# EAGLE board core (EAGLE 9.6.2), part 1 of 2
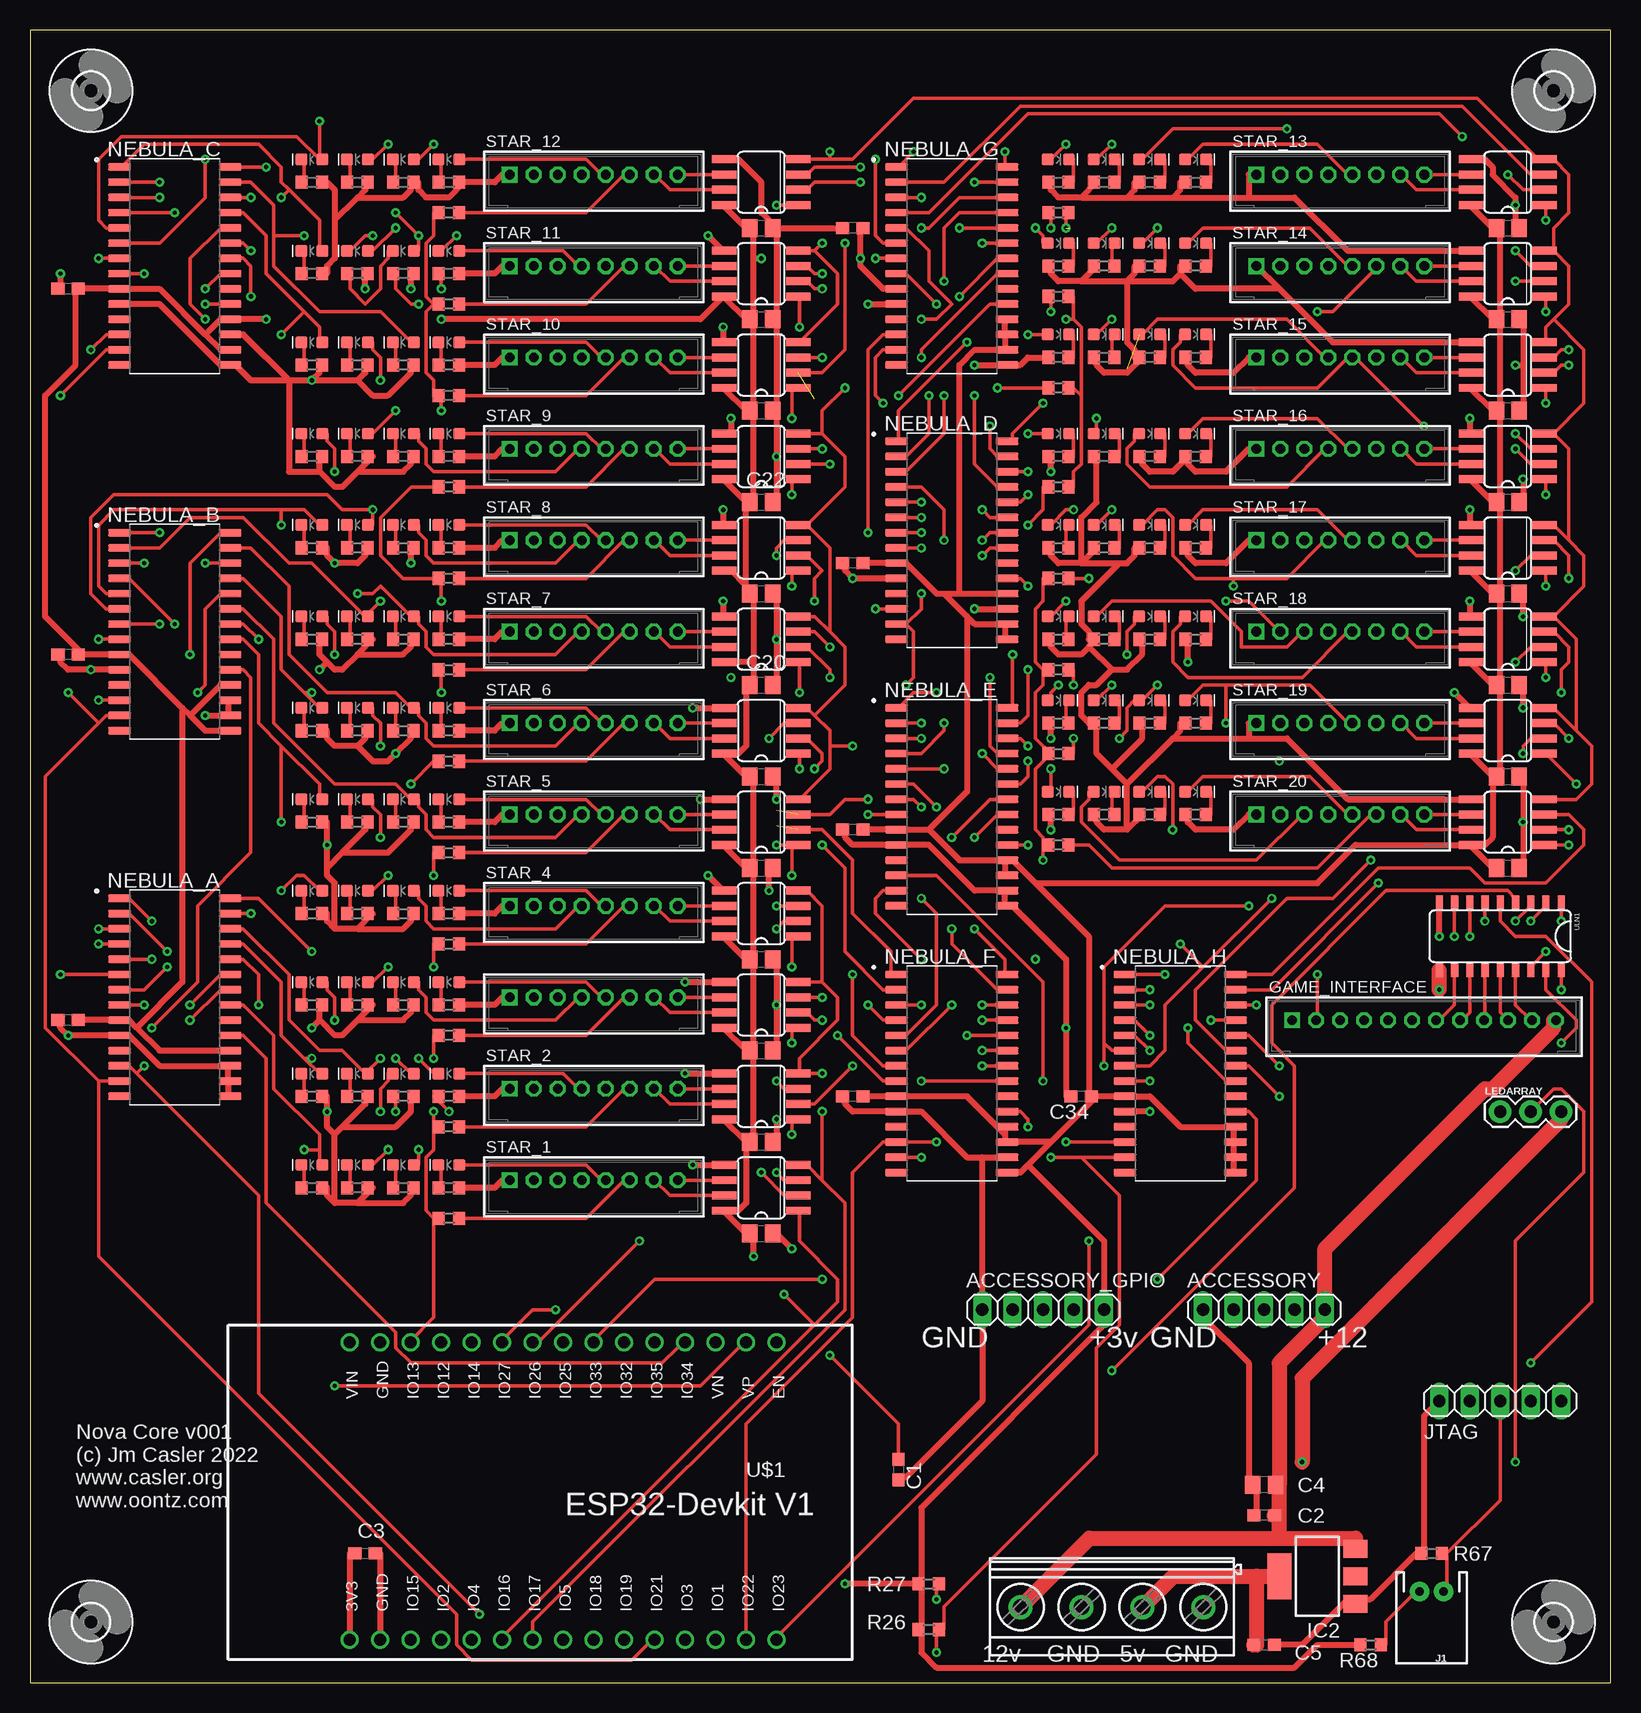
[diagram p0: board, top side]
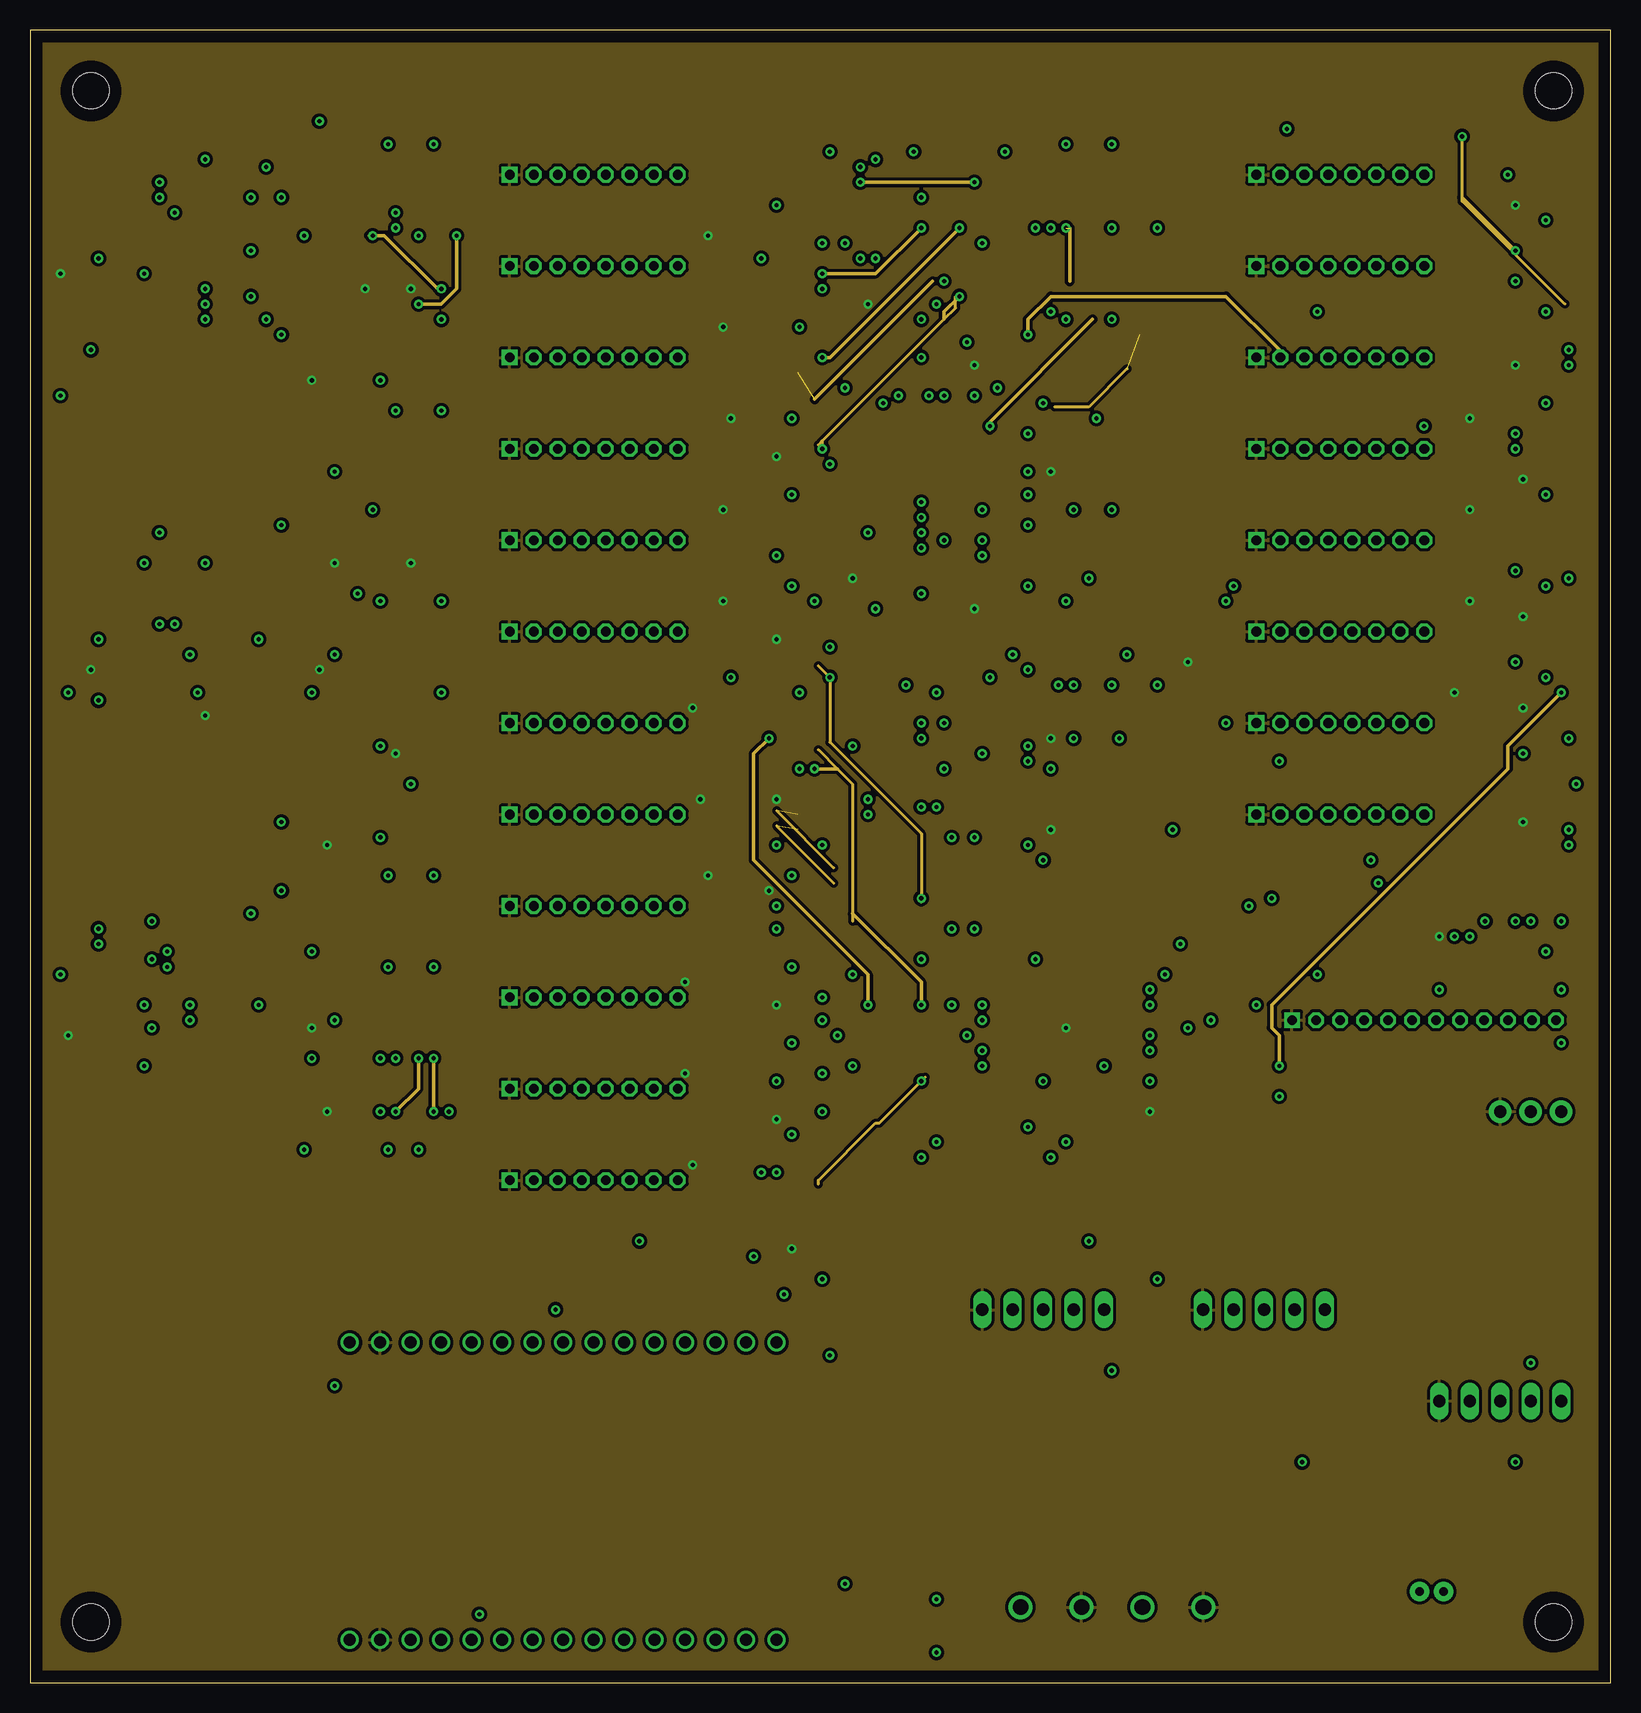
[diagram p1: board, inner layer $GND]
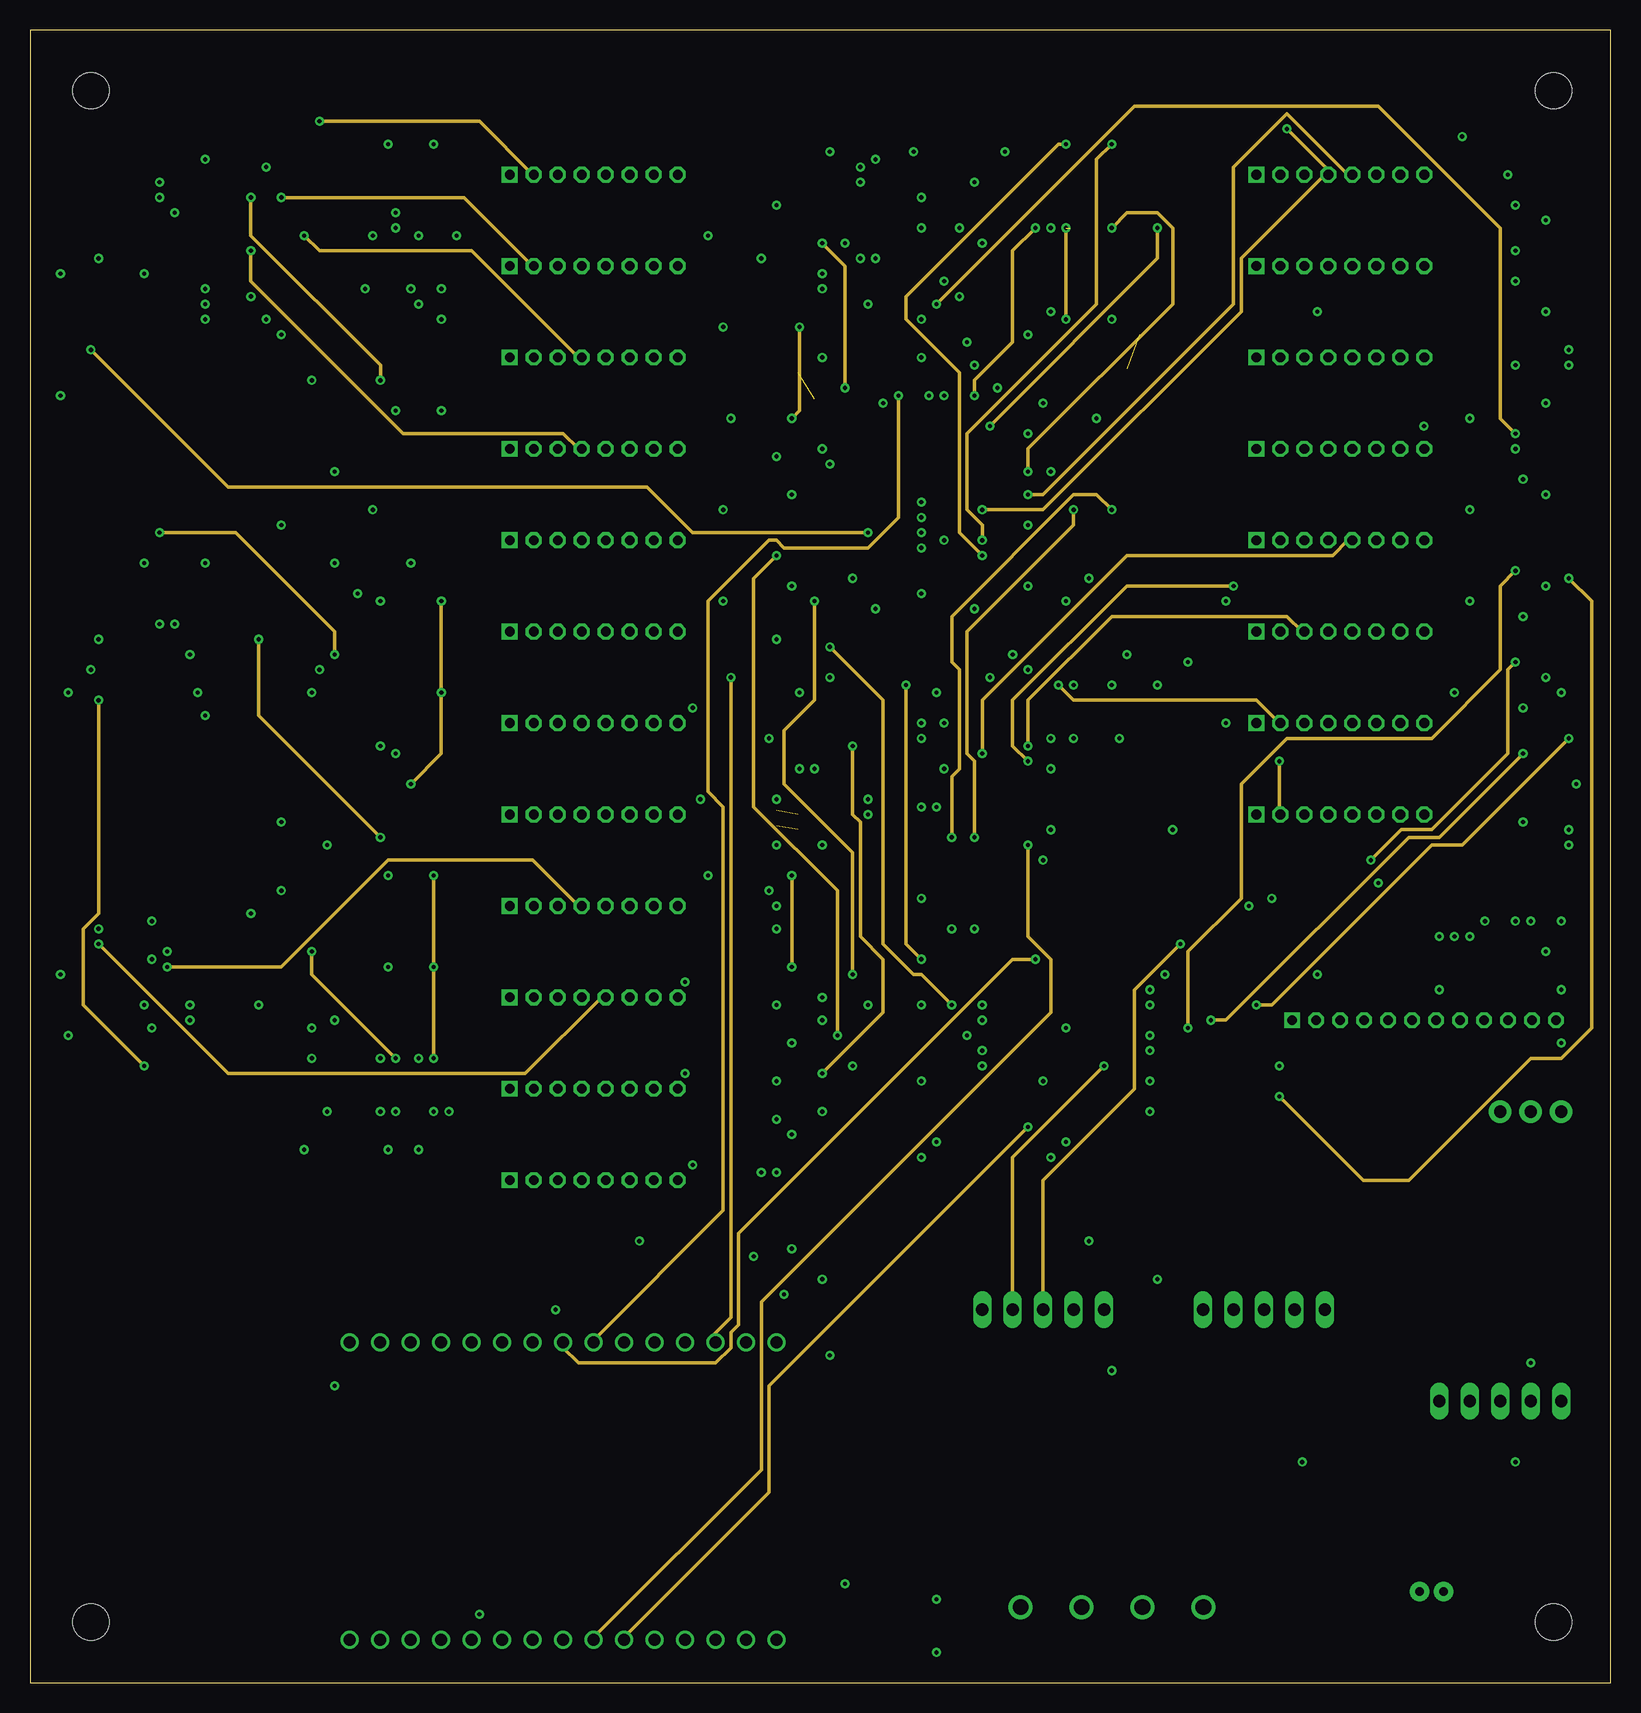
[diagram p2: board, inner layer SIGNAL3]
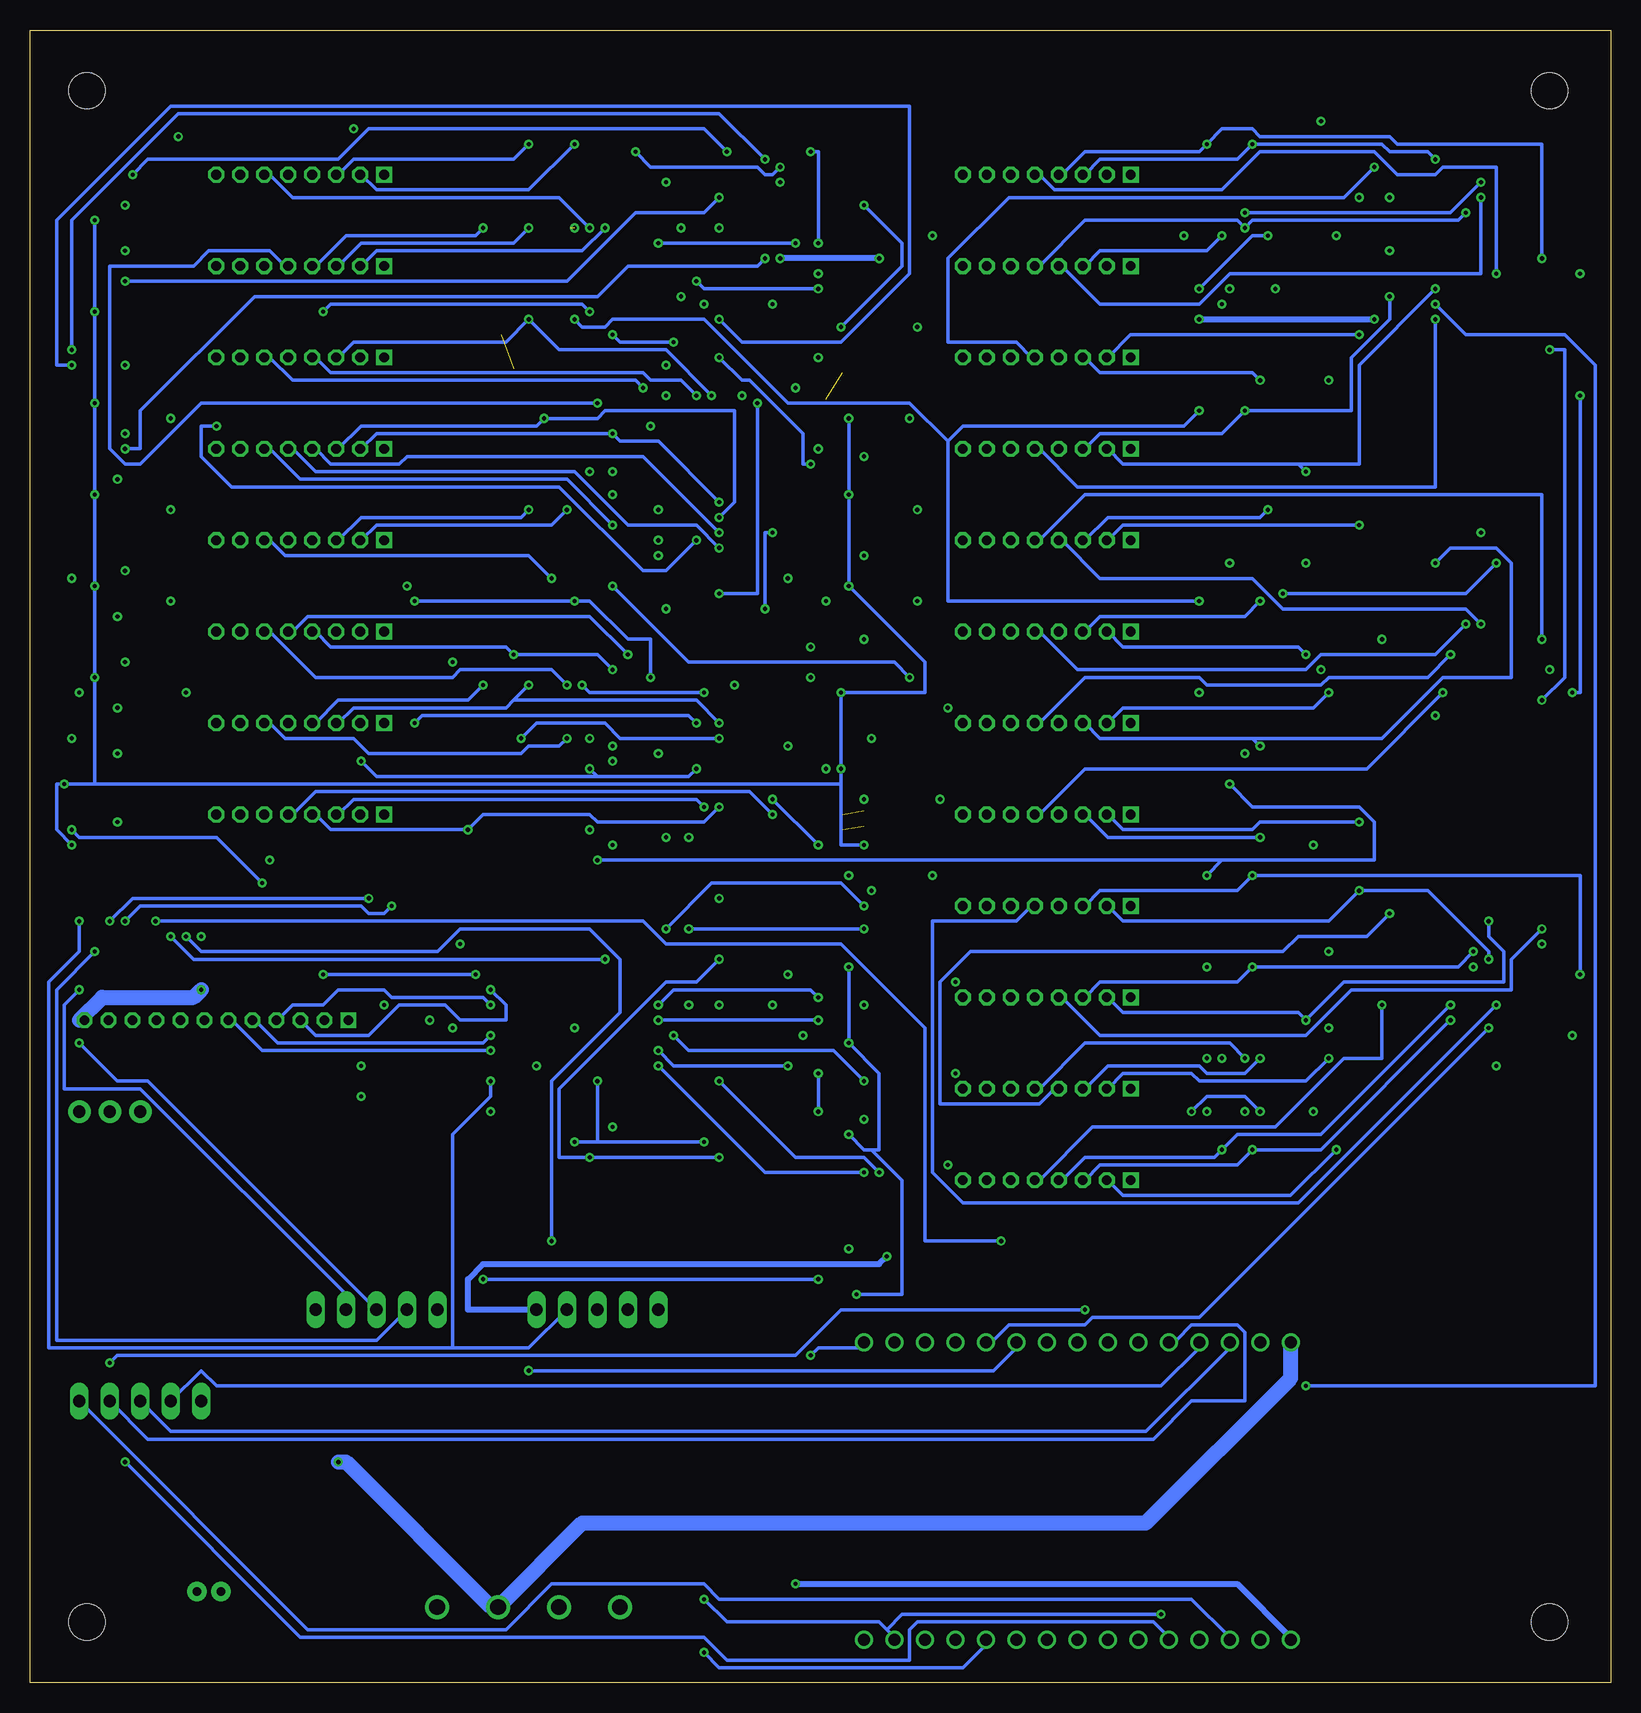
[diagram p3: board, bottom side, seen from below]

Size 131.75 x 137.78 mm. Coordinates in mm from the lower left corner, seen from the top.
Outline: 0,0 131.75,0 131.75,137.78 0,137.78 0,0
Copper layers (1+2*15+16): Top 0.035mm / dielectric 1.5mm / $GND 0.035mm / dielectric 0.15mm / SIGNAL3 0.035mm / dielectric 0.2mm / Bottom 0.035mm
Design rules "default *": minimum track width 6mil, minimum drill 0.35mm, track to track 6mil, track to pad 6mil, pad to pad 6mil, via to via 6mil, smd to smd 6mil, copper to edge 40mil, drill to drill 6mil, minimum pad ring 10mil, minimum via ring 8mil, stop-mask expansion 4mil, vias tented up to drill 20mil, thermal gap 10mil
Net classes: 0 default: width 0.305 mm, clearance 0.254 mm; 1 GND: width 0.508 mm, clearance 0.254 mm; 2 12V: width 1.27 mm, clearance 0.254 mm; 3 5V: width 1.27 mm, clearance 0.254 mm; 4 3V3: width 0.508 mm, clearance 0.254 mm; 5 12V_FUSED: width 0.635 mm, clearance 0.254 mm

## Footprints (pad centres in the part's own frame; a part is rotated, then mirrored left to right if it is on the bottom)
1X05 = drill 1.016 long: 1 -5.08,0; 2 -2.54,0; 3 0,0; 4 2.54,0; 5 5.08,0
C0603 = smd 1.1 x 1: 1 -0.85,0; 2 0.85,0
C0805 = smd 1.3 x 1.5: 1 -0.95,0; 2 0.95,0
LED-0603 = smd 1 x 1: A -0.877,0; C 0.877,0
B12B-PH-K = drill 0.813 square: 1 -11,0 | drill 0.813 octagon: 2 -9,0; 3 -7,0; 4 -5,0; 5 -3,0; 6 -1,0; 7 1,0; 8 3,0; 9 5,0; 10 7,0; 11 9,0; 12 11,0
3,0 = hole 3: 0,0
SO08 = smd 0.66 x 2.032: 1 -1.905,-3.073; 2 -0.635,-3.073; 3 0.635,-3.073; 4 1.905,-3.073; 5 1.905,3.073; 6 0.635,3.073; 7 -0.635,3.073; 8 -1.905,3.073
SOT223 = smd 1.5 x 2: 1 -2.3,-3.15; 2 0,-3.15; 3 2.3,-3.15 | smd 3.8 x 2: 4 0,3.15
JST-2-PTH = drill 0.7 pad 1.6: 1 -1,0; 2 1,0
1X03 = drill 1.016 pad 1.88: 1 0,0; 2 2.54,0; 3 5.08,0
SOIC127P1030X265-28N = smd 1.9 x 0.6: 1 -4.605,8.255; 2 -4.605,6.985; 3 -4.605,5.715; 4 -4.605,4.445; 5 -4.605,3.175; 6 -4.605,1.905; 7 -4.605,0.635; 8 -4.605,-0.635; 9 -4.605,-1.905; 10 -4.605,-3.175; 11 -4.605,-4.445; 12 -4.605,-5.715; 13 -4.605,-6.985; 14 -4.605,-8.255; 15 4.605,-8.255; 16 4.605,-6.985; 17 4.605,-5.715; 18 4.605,-4.445; 19 4.605,-3.175; 20 4.605,-1.905; 21 4.605,-0.635; 22 4.605,0.635; 23 4.605,1.905; 24 4.605,3.175; 25 4.605,4.445; 26 4.605,5.715; 27 4.605,6.985; 28 4.605,8.255
MKDSN1,5/4-5,08 = drill 1.3 pad 2: 1 -7.641,0.025; 2 -2.561,0.025; 3 2.519,0.025; 4 7.599,0.025
R0603 = smd 1 x 1.1: 1 -0.85,0; 2 0.85,0
B8B-PH-K = drill 0.813 square: 1 -7,0 | drill 0.813 octagon: 2 -5,0; 3 -3,0; 4 -1,0; 5 1,0; 6 3,0; 7 5,0; 8 7,0
ESP32-DEVKITV1 = drill 1 pad 1.422: 1 -22.87,-13.54; 2 -20.33,-13.54; 3 -17.79,-13.54; 4 -15.25,-13.54; 5 -12.71,-13.54; 6 -10.17,-13.54; 7 -7.63,-13.54; 8 -5.09,-13.54; 9 -2.55,-13.54; 10 -0.01,-13.54; 11 2.53,-13.54; 12 5.07,-13.54; 13 7.61,-13.54; 14 10.15,-13.54; 15 12.69,-13.54; 16 12.69,11.23; 17 10.15,11.23; 18 7.61,11.23; 19 5.07,11.23; 20 2.53,11.23; 21 -0.01,11.23; 22 -2.55,11.23; 23 -5.09,11.23; 24 -7.63,11.23; 25 -10.17,11.23; 26 -12.71,11.23; 27 -15.25,11.23; 28 -17.79,11.23; 29 -20.33,11.23; 30 -22.87,11.23
SO018 = smd 0.6 x 1.2: 1 -5.08,-2.8; 2 -3.81,-2.8; 3 -2.54,-2.8; 4 -1.27,-2.8; 5 0,-2.8; 6 1.27,-2.8; 7 2.54,-2.8; 8 3.81,-2.8; 9 5.08,-2.8; 10 5.08,2.8; 11 3.81,2.8; 12 2.54,2.8; 13 1.27,2.8; 14 0,2.8; 15 -1.27,2.8; 16 -2.54,2.8; 17 -3.81,2.8; 18 -5.08,2.8

## Placement (x,y rotation side)
ACCESSORY  [1X05]  102.87,31.11 0 top
ACCESSORY_GPIO  [1X05]  84.45,31.11 0 top
C1  10uf  [C0603]  72.39,17.78 270 top
C2  10uf  [C0603]  102.87,13.97 180 top
C3  10uf  [C0603]  27.94,10.79 0 top
C4  1uf  [C0805]  102.87,16.51 180 top
C5  10uf  [C0603]  102.87,3.17 0 top
C7  10uf  [C0603]  68.58,71.12 180 top
C8  10uf  [C0603]  3.17,55.24 180 top
C9  10uf  [C0603]  3.17,116.2 180 top
C10  10uf  [C0603]  3.17,85.72 180 top
C11  10uf  [C0603]  68.58,93.34 180 top
C12  10uf  [C0603]  68.58,48.9 180 top
C13  10uf  [C0603]  68.58,121.28 180 top
C14  1uf  [C0805]  60.96,37.47 0 top
C15  1uf  [C0805]  60.96,45.09 0 top
C16  1uf  [C0805]  60.96,52.7 0 top
C17  1uf  [C0805]  60.96,60.33 0 top
C18  1uf  [C0805]  60.96,67.94 0 top
C19  1uf  [C0805]  60.96,75.56 0 top
C20  1uf  [C0805]  60.96,83.19 0 top
C21  1uf  [C0805]  60.96,90.81 0 top
C22  1uf  [C0805]  60.96,98.42 0 top
C23  1uf  [C0805]  60.96,106.05 0 top
C24  1uf  [C0805]  60.96,113.67 0 top
C25  1uf  [C0805]  60.96,121.28 0 top
C26  1uf  [C0805]  123.19,67.94 0 top
C27  1uf  [C0805]  123.19,75.56 0 top
C28  1uf  [C0805]  123.19,83.19 0 top
C29  1uf  [C0805]  123.19,90.81 0 top
C30  1uf  [C0805]  123.19,98.42 0 top
C31  1uf  [C0805]  123.19,106.05 0 top
C32  1uf  [C0805]  123.19,113.67 0 top
C33  1uf  [C0805]  123.19,121.28 0 top
C34  10uf  [C0603]  87.63,48.9 180 top
D1  [LED-0603]  85.72,127 0 top
D2  [LED-0603]  23.5,43.18 180 top
D3  [LED-0603]  27.3,43.18 180 top
D4  [LED-0603]  31.11,43.18 180 top
D5  [LED-0603]  34.92,43.18 180 top
D6  [LED-0603]  23.5,50.8 180 top
D7  [LED-0603]  27.3,50.8 180 top
D8  [LED-0603]  34.92,50.8 180 top
D9  [LED-0603]  31.11,50.8 180 top
D10  [LED-0603]  23.5,58.42 180 top
D11  [LED-0603]  27.3,58.42 180 top
D12  [LED-0603]  31.11,58.42 180 top
D13  [LED-0603]  34.92,58.42 180 top
D14  [LED-0603]  23.5,66.04 180 top
D15  [LED-0603]  27.3,66.04 180 top
D16  [LED-0603]  31.11,66.04 180 top
D17  [LED-0603]  34.92,66.04 180 top
D18  [LED-0603]  23.5,73.66 180 top
D19  [LED-0603]  27.3,73.66 180 top
D20  [LED-0603]  31.11,73.66 180 top
D21  [LED-0603]  34.92,73.66 180 top
D22  [LED-0603]  23.5,81.28 180 top
D23  [LED-0603]  27.3,81.28 180 top
D24  [LED-0603]  31.11,81.28 180 top
D25  [LED-0603]  34.92,81.28 180 top
D26  [LED-0603]  23.5,88.9 180 top
D27  [LED-0603]  27.3,88.9 180 top
D28  [LED-0603]  31.11,88.9 180 top
D29  [LED-0603]  34.92,88.9 180 top
D30  [LED-0603]  23.5,96.52 180 top
D31  [LED-0603]  27.3,96.52 180 top
D32  [LED-0603]  31.11,96.52 180 top
D33  [LED-0603]  34.92,96.52 180 top
D34  [LED-0603]  23.5,104.14 180 top
D35  [LED-0603]  27.3,104.14 180 top
D36  [LED-0603]  31.11,104.14 180 top
D37  [LED-0603]  34.92,104.14 180 top
D38  [LED-0603]  23.5,111.76 180 top
D39  [LED-0603]  27.3,111.76 180 top
D40  [LED-0603]  31.11,111.76 180 top
D41  [LED-0603]  34.92,111.76 180 top
D42  [LED-0603]  23.5,119.38 180 top
D43  [LED-0603]  31.11,119.38 180 top
D44  [LED-0603]  34.92,119.38 180 top
D45  [LED-0603]  27.3,119.38 180 top
D46  [LED-0603]  23.5,127 180 top
D47  [LED-0603]  27.3,127 180 top
D48  [LED-0603]  31.11,127 180 top
D49  [LED-0603]  34.92,127 180 top
D50  [LED-0603]  89.53,127 0 top
D51  [LED-0603]  93.34,127 0 top
D52  [LED-0603]  97.16,127 0 top
D53  [LED-0603]  85.72,120.02 0 top
D54  [LED-0603]  89.53,120.02 0 top
D55  [LED-0603]  93.34,120.02 0 top
D56  [LED-0603]  97.16,120.02 0 top
D57  [LED-0603]  85.72,112.39 0 top
D58  [LED-0603]  89.53,112.39 0 top
D59  [LED-0603]  93.34,112.39 0 top
D60  [LED-0603]  97.16,112.39 0 top
D61  [LED-0603]  85.72,104.14 0 top
D62  [LED-0603]  89.53,104.14 0 top
D63  [LED-0603]  93.34,104.14 0 top
D64  [LED-0603]  97.16,104.14 0 top
D65  [LED-0603]  85.72,96.52 0 top
D66  [LED-0603]  89.53,96.52 0 top
D67  [LED-0603]  93.34,96.52 0 top
D68  [LED-0603]  97.16,96.52 0 top
D69  [LED-0603]  85.72,88.9 0 top
D70  [LED-0603]  89.53,88.9 0 top
D71  [LED-0603]  93.34,88.9 0 top
D72  [LED-0603]  97.16,88.9 0 top
D73  [LED-0603]  85.72,81.92 0 top
D74  [LED-0603]  89.53,81.92 0 top
D75  [LED-0603]  93.34,81.92 0 top
D76  [LED-0603]  97.16,81.92 0 top
D77  [LED-0603]  85.72,74.3 0 top
D78  [LED-0603]  89.53,74.3 0 top
D79  [LED-0603]  93.34,74.3 0 top
D80  [LED-0603]  97.16,74.3 0 top
GAME_INTERFACE  B12B-PH-K  [B12B-PH-K]  116.2,55.24 0 top
H1  MOUNT-HOLE3.0  [3,0]  127,5.08 0 top
H2  MOUNT-HOLE3.0  [3,0]  127,132.72 0 top
H3  MOUNT-HOLE3.0  [3,0]  5.08,132.72 0 top
H4  MOUNT-HOLE3.0  [3,0]  5.08,5.08 0 top
IC1  MAX481CSA  [SO08]  60.96,41.27 90 top
IC2  LD117AS12TR  [SOT223]  107.31,8.89 90 top
IC3  MAX481CSA  [SO08]  60.96,48.9 90 top
IC4  MAX481CSA  [SO08]  60.96,56.52 90 top
IC5  MAX481CSA  [SO08]  60.96,64.14 90 top
IC6  MAX481CSA  [SO08]  60.96,71.75 90 top
IC7  MAX481CSA  [SO08]  60.96,79.38 90 top
IC8  MAX481CSA  [SO08]  60.96,87 90 top
IC9  MAX481CSA  [SO08]  60.96,94.61 90 top
IC10  MAX481CSA  [SO08]  60.96,102.23 90 top
IC11  MAX481CSA  [SO08]  60.96,109.86 90 top
IC12  MAX481CSA  [SO08]  60.96,117.47 90 top
IC13  MAX481CSA  [SO08]  60.96,125.09 90 top
IC14  MAX481CSA  [SO08]  123.19,125.09 90 top
IC15  MAX481CSA  [SO08]  123.19,117.47 90 top
IC16  MAX481CSA  [SO08]  123.19,109.86 90 top
IC17  MAX481CSA  [SO08]  123.19,102.23 90 top
IC18  MAX481CSA  [SO08]  123.19,94.61 90 top
IC19  MAX481CSA  [SO08]  123.19,87 90 top
IC20  MAX481CSA  [SO08]  123.19,79.38 90 top
IC21  MAX481CSA  [SO08]  123.19,71.75 90 top
J1  [JST-2-PTH]  116.84,7.62 180 top
JTAG  [1X05]  122.56,23.5 0 top
LEDARRAY  [1X03]  122.56,47.62 0 top
NEBULA_A  MCP23017-E/SO  [SOIC127P1030X265-28N]  12.06,57.15 0 top
NEBULA_B  MCP23017-E/SO  [SOIC127P1030X265-28N]  12.06,87.63 0 top
NEBULA_C  MCP23017-E/SO  [SOIC127P1030X265-28N]  12.06,118.11 0 top
NEBULA_D  MCP23017-E/SO  [SOIC127P1030X265-28N]  76.83,95.25 0 top
NEBULA_E  MCP23017-E/SO  [SOIC127P1030X265-28N]  76.83,73.03 0 top
NEBULA_F  MCP23017-E/SO  [SOIC127P1030X265-28N]  76.83,50.8 0 top
NEBULA_G  MCP23017-E/SO  [SOIC127P1030X265-28N]  76.83,118.11 0 top
NEBULA_H  MCP23017-E/SO  [SOIC127P1030X265-28N]  95.89,50.8 0 top
POWER_IN  MKDSN1,5/4-5,08  [MKDSN1,5/4-5,08]  90.17,6.35 180 top
R3  10k  [R0603]  23.5,41.27 180 top
R4  10k  [R0603]  27.3,41.27 180 top
R5  10k  [R0603]  31.11,41.27 180 top
R6  10k  [R0603]  34.92,41.27 180 top
R7  10k  [R0603]  23.5,48.9 180 top
R8  10k  [R0603]  27.3,48.9 180 top
R9  10k  [R0603]  31.11,48.9 180 top
R10  10k  [R0603]  34.92,48.9 180 top
R11  10k  [R0603]  23.5,56.52 180 top
R12  10k  [R0603]  27.3,56.52 180 top
R13  10k  [R0603]  31.11,56.52 180 top
R14  10k  [R0603]  34.92,56.52 180 top
R15  10k  [R0603]  23.5,64.14 180 top
R16  10k  [R0603]  27.3,64.14 180 top
R17  10k  [R0603]  31.11,64.14 180 top
R18  10k  [R0603]  34.92,64.14 180 top
R19  10k  [R0603]  23.5,71.75 180 top
R20  10k  [R0603]  27.3,71.75 180 top
R21  10k  [R0603]  31.11,71.75 180 top
R22  10k  [R0603]  34.92,71.75 180 top
R23  10k  [R0603]  23.5,79.38 180 top
R24  10k  [R0603]  27.3,79.38 180 top
R25  10k  [R0603]  31.11,79.38 180 top
R26  10k  [R0603]  74.93,4.45 180 top
R27  10k  [R0603]  74.93,8.26 180 top
R28  10k  [R0603]  34.92,79.38 180 top
R29  10k  [R0603]  23.5,87 180 top
R30  10k  [R0603]  27.3,87 180 top
R31  10k  [R0603]  31.11,87 180 top
R32  10k  [R0603]  34.92,87 180 top
R33  10k  [R0603]  23.5,94.61 180 top
R34  10k  [R0603]  27.3,94.61 180 top
R35  10k  [R0603]  31.11,94.61 180 top
R36  10k  [R0603]  34.92,94.61 180 top
R37  10k  [R0603]  23.5,102.23 180 top
R38  10k  [R0603]  27.3,102.23 180 top
R39  10k  [R0603]  31.11,102.23 180 top
R40  10k  [R0603]  34.92,102.23 180 top
R41  10k  [R0603]  23.5,109.86 180 top
R42  10k  [R0603]  27.3,109.86 180 top
R43  10k  [R0603]  31.11,109.86 180 top
R44  10k  [R0603]  34.92,109.86 180 top
R45  10k  [R0603]  23.5,117.47 180 top
R46  10k  [R0603]  27.3,117.47 180 top
R47  10k  [R0603]  31.11,117.47 180 top
R48  10k  [R0603]  34.92,117.47 180 top
R49  10k  [R0603]  23.5,125.09 180 top
R50  10k  [R0603]  27.3,125.09 180 top
R51  10k  [R0603]  31.11,125.09 180 top
R52  10k  [R0603]  34.92,125.09 180 top
R53  10k  [R0603]  85.72,125.09 0 top
R54  68  [R0603]  34.92,38.73 0 top
R55  68  [R0603]  34.92,46.35 0 top
R56  68  [R0603]  34.92,53.98 0 top
R57  68  [R0603]  34.92,61.59 0 top
R58  68  [R0603]  34.92,69.22 0 top
R59  68  [R0603]  34.92,76.83 0 top
R60  68  [R0603]  34.92,84.45 0 top
R61  68  [R0603]  34.92,92.08 0 top
R62  68  [R0603]  34.92,99.69 0 top
R63  68  [R0603]  34.92,107.31 0 top
R64  68  [R0603]  34.92,114.94 0 top
R65  68  [R0603]  34.92,122.56 0 top
R66  10k  [R0603]  89.53,125.09 0 top
R67  10k  [R0603]  116.84,10.79 180 top
R68  68  [R0603]  111.76,3.17 180 top
R69  10k  [R0603]  93.34,125.09 0 top
R70  10k  [R0603]  97.16,125.09 0 top
R71  10k  [R0603]  85.72,118.11 0 top
R72  10k  [R0603]  89.53,118.11 0 top
R73  10k  [R0603]  93.34,118.11 0 top
R74  10k  [R0603]  97.16,118.11 0 top
R75  10k  [R0603]  85.72,110.49 0 top
R76  10k  [R0603]  89.53,110.49 0 top
R77  10k  [R0603]  93.34,110.49 0 top
R78  10k  [R0603]  97.16,110.49 0 top
R79  10k  [R0603]  85.72,102.23 0 top
R80  10k  [R0603]  89.53,102.23 0 top
R81  10k  [R0603]  93.34,102.23 0 top
R82  10k  [R0603]  97.16,102.23 0 top
R83  68  [R0603]  85.72,122.56 180 top
R84  68  [R0603]  85.72,115.57 180 top
R85  68  [R0603]  85.72,107.95 180 top
R86  68  [R0603]  85.72,99.69 180 top
R87  10k  [R0603]  85.72,94.61 0 top
R88  10k  [R0603]  89.53,94.61 0 top
R89  10k  [R0603]  93.34,94.61 0 top
R90  10k  [R0603]  97.16,94.61 0 top
R91  10k  [R0603]  85.72,87 0 top
R92  10k  [R0603]  89.53,87 0 top
R93  10k  [R0603]  93.34,87 0 top
R94  10k  [R0603]  97.16,87 0 top
R95  10k  [R0603]  85.72,80.01 0 top
R96  10k  [R0603]  89.53,80.01 0 top
R97  10k  [R0603]  93.34,80.01 0 top
R98  10k  [R0603]  97.16,80.01 0 top
R99  10k  [R0603]  85.72,72.39 0 top
R100  10k  [R0603]  89.53,72.39 0 top
R101  10k  [R0603]  93.34,72.39 0 top
R102  10k  [R0603]  97.16,72.39 0 top
R103  68  [R0603]  85.72,92.08 0 top
R104  68  [R0603]  85.72,84.45 0 top
R105  68  [R0603]  85.72,77.47 0 top
R106  68  [R0603]  85.72,69.85 0 top
STAR_1  B8B-PH-K  [B8B-PH-K]  46.99,41.91 0 top
STAR_2  B8B-PH-K  [B8B-PH-K]  46.99,49.53 0 top
STAR_3  B8B-PH-K  [B8B-PH-K]  46.99,57.15 0 top
STAR_4  B8B-PH-K  [B8B-PH-K]  46.99,64.77 0 top
STAR_5  B8B-PH-K  [B8B-PH-K]  46.99,72.39 0 top
STAR_6  B8B-PH-K  [B8B-PH-K]  46.99,80.01 0 top
STAR_7  B8B-PH-K  [B8B-PH-K]  46.99,87.63 0 top
STAR_8  B8B-PH-K  [B8B-PH-K]  46.99,95.25 0 top
STAR_9  B8B-PH-K  [B8B-PH-K]  46.99,102.87 0 top
STAR_10  B8B-PH-K  [B8B-PH-K]  46.99,110.49 0 top
STAR_11  B8B-PH-K  [B8B-PH-K]  46.99,118.11 0 top
STAR_12  B8B-PH-K  [B8B-PH-K]  46.99,125.73 0 top
STAR_13  B8B-PH-K  [B8B-PH-K]  109.22,125.73 0 top
STAR_14  B8B-PH-K  [B8B-PH-K]  109.22,118.11 0 top
STAR_15  B8B-PH-K  [B8B-PH-K]  109.22,110.49 0 top
STAR_16  B8B-PH-K  [B8B-PH-K]  109.22,102.87 0 top
STAR_17  B8B-PH-K  [B8B-PH-K]  109.22,95.25 0 top
STAR_18  B8B-PH-K  [B8B-PH-K]  109.22,87.63 0 top
STAR_19  B8B-PH-K  [B8B-PH-K]  109.22,80.01 0 top
STAR_20  B8B-PH-K  [B8B-PH-K]  109.22,72.39 0 top
U$1  ESP32DEVKITV1  [ESP32-DEVKITV1]  49.53,17.14 0 top
ULN1  [SO018]  122.56,62.23 180 top

## Library data of the parts
ACCESSORY ACCESSORY_GPIO JTAG = pinhead
C1-C3 C5 C7-C13 C34 = rcl; LCSC_PART: C19702; SPICEPREFIX: C
C4 C14-C33 = rcl; LCSC_PART: C15849; SPICEPREFIX: C
D1 D2 D6 D10 D14 D18 D22 D26 D30 D34 D38 D42 D46 D53 D57 D61 D65 D69 D73 D77 = SparkFun-LED; LCSC_PART: C2286
D3 D7 D11 D15 D19 D23 D27 D31 D35 D39 D43 D47 D50 D54 D58 D62 D66 D70 D74 D78 = SparkFun-LED; LCSC_PART: C72043
D4 D8 D12 D16 D20 D24 D28 D32 D36 D40 D44 D48 D51 D55 D59 D63 D67 D71 D75 D79 = SparkFun-LED; LCSC_PART: C72041
D5 D9 D13 D17 D21 D25 D29 D33 D37 D41 D45 D49 D52 D56 D60 D64 D68 D72 D76 D80 = SparkFun-LED; LCSC_PART: C2290
GAME_INTERFACE STAR_1-STAR_20 = con-jst-ph
H1-H4 = holes
IC1 IC3-IC21 = maxim; LCSC_PART: C8963; MF: MAXIM; MPN: MAX481CSA; OC_FARNELL: unknown; OC_NEWARK: 90C3817
IC2 = v-reg; LCSC_PART: C6187; PRICE: 0.5
J1 = SparkFun-Connectors; PROD_ID: CONN-09863; SKU: PRT-09914
LEDARRAY = SparkFun-Connectors
NEBULA_A NEBULA_B NEBULA_C NEBULA_D NEBULA_E NEBULA_F NEBULA_G NEBULA_H = MCP23017-E_SO; AVAILABILITY: In Stock; DESCRIPTION: I/O Expander 16 I²C 1.7 MHz 28-SOIC; LCSC_PART: C629440; MF: Microchip; MP: MCP23017-E/SO; PACKAGE: SOIC-28 Microchip; PRICE: None; PURCHASE-URL: https://pricing.snapeda.com/search/part/MCP23017-E/SO/?ref=eda
POWER_IN = con-phoenix-508
R3-R106 = rcl; LCSC_PART: C25804; SPICEPREFIX: R
U$1 = ESP32-DEVKITV1
ULN1 = SparkFun-IC-Special-Function

## Nets
2: U$1.4
4: LEDARRAY.2 U$1.5
5: U$1.8
12: JTAG.2 U$1.27
13: J1.1 JTAG.3 R54.1 R55.1 R56.1 R57.1 R58.1 R59.1 R60.1 R61.1 R62.1 R63.1 R64.1 R65.1 R67.1 R83.1 R84.1 R85.1 R86.1 R103.1 R104.1 R105.1 R106.1 U$1.28
14: JTAG.4 U$1.26
15: JTAG.5 U$1.3
16: IC1.1 IC3.1 IC4.1 IC5.1 IC6.1 IC7.1 IC8.1 IC9.1 IC10.1 IC11.1 IC12.1 IC13.1 IC14.1 IC15.1 IC16.1 IC17.1 IC18.1 IC19.1 IC20.1 IC21.1 U$1.6
17: IC1.4 IC3.4 IC4.4 IC5.4 IC6.4 IC7.4 IC8.4 IC9.4 IC10.4 IC11.4 IC12.4 IC13.4 IC14.4 IC15.4 IC16.4 IC17.4 IC18.4 IC19.4 IC20.4 IC21.4 U$1.7
18: NEBULA_E.19 U$1.9
19: NEBULA_F.19 U$1.10
21/SDA: NEBULA_A.13 NEBULA_B.13 NEBULA_C.13 NEBULA_D.13 NEBULA_E.13 NEBULA_F.13 NEBULA_G.13 NEBULA_H.13 R26.1 U$1.11
22/SCL: NEBULA_A.12 NEBULA_B.12 NEBULA_C.12 NEBULA_D.12 NEBULA_E.12 NEBULA_F.12 NEBULA_G.12 NEBULA_H.12 R27.1 U$1.14
23: U$1.15 ULN1.8
25: U$1.23 ULN1.7
26: U$1.24 ULN1.6
27: U$1.25 ULN1.5
32: U$1.21 ULN1.4
33: NEBULA_G.19 NEBULA_H.19 U$1.22
34: NEBULA_A.19 U$1.19
35: NEBULA_B.19 U$1.20
36: NEBULA_C.19 U$1.17
39: NEBULA_D.19 U$1.18
+3V3 [3V3]: ACCESSORY_GPIO.5 C3.1 C7.1 C8.1 C9.1 C10.1 C11.1 C12.1 C13.1 C14.1 C15.1 C16.1 C17.1 C18.1 C19.1 C20.1 C21.1 C22.1 C23.1 C24.1 C25.1 C26.1 C27.1 C28.1 C29.1 C30.1 C31.1 C32.1 C33.1 C34.1 IC1.8 IC3.8 IC4.8 IC5.8 IC6.8 IC7.8 IC8.8 IC9.8 IC10.8 IC11.8 IC12.8 IC13.8 IC14.8 IC15.8 IC16.8 IC17.8 IC18.8 IC19.8 IC20.8 IC21.8 NEBULA_A.9 NEBULA_A.18 NEBULA_B.9 NEBULA_B.15 NEBULA_B.18 NEBULA_C.9 NEBULA_C.16 NEBULA_C.18 NEBULA_D.9 NEBULA_D.15 NEBULA_D.16 NEBULA_D.18 NEBULA_E.9 NEBULA_E.17 NEBULA_E.18 NEBULA_F.9 NEBULA_F.15 NEBULA_F.17 NEBULA_F.18 NEBULA_G.9 NEBULA_G.16 NEBULA_G.17 NEBULA_G.18 NEBULA_H.9 NEBULA_H.15 NEBULA_H.16 NEBULA_H.17 NEBULA_H.18 R26.2 R27.2 R68.2 U$1.1
+5V [5V]: C5.1 IC2.4 LEDARRAY.3 POWER_IN.2 U$1.30
+12V [12V]: ACCESSORY.5 C2.1 C4.1 GAME_INTERFACE.12 IC2.3 POWER_IN.4 ULN1.10
A0: D2.A NEBULA_A.21 STAR_1.2
A1: D3.A NEBULA_A.22 STAR_1.3
A2: D4.A NEBULA_A.23 STAR_1.4
A3: D5.A NEBULA_A.24 STAR_1.5
A4: D6.A NEBULA_A.25 STAR_2.2
A5: D7.A NEBULA_A.26 STAR_2.3
A6: D8.A NEBULA_A.27 STAR_2.4
A7: D9.A NEBULA_A.28 STAR_2.5
A8: D10.A NEBULA_A.1 STAR_3.2
A9: D11.A NEBULA_A.2 STAR_3.3
A10: D12.A NEBULA_A.3 STAR_3.4
A11: D13.A NEBULA_A.4 STAR_3.5
A12: D14.A NEBULA_A.5 STAR_4.2
A13: D15.A NEBULA_A.6 STAR_4.3
A14: D16.A NEBULA_A.7 STAR_4.4
A15: D17.A NEBULA_A.8 STAR_4.5
B0: D18.A NEBULA_B.21 STAR_5.2
B1: D19.A NEBULA_B.22 STAR_5.3
B2: D20.A NEBULA_B.23 STAR_5.4
B3: D21.A NEBULA_B.24 STAR_5.5
B4: D22.A NEBULA_B.25 STAR_6.2
B5: D23.A NEBULA_B.26 STAR_6.3
B6: D24.A NEBULA_B.27 STAR_6.4
B7: D25.A NEBULA_B.28 STAR_6.5
B8: D26.A NEBULA_B.1 STAR_7.2
B9: D27.A NEBULA_B.2 STAR_7.3
B10: D28.A NEBULA_B.3 STAR_7.4
B11: D29.A NEBULA_B.4 STAR_7.5
B12: D30.A NEBULA_B.5 STAR_8.2
B13: D31.A NEBULA_B.6 STAR_8.3
B14: D32.A NEBULA_B.7 STAR_8.4
B15: D33.A NEBULA_B.8 STAR_8.5
C0: D34.A NEBULA_C.21 STAR_9.2
C1: D35.A NEBULA_C.22 STAR_9.3
C2: D36.A NEBULA_C.23 STAR_9.4
C3: D37.A NEBULA_C.24 STAR_9.5
C4: D38.A NEBULA_C.25 STAR_10.2
C5: D39.A NEBULA_C.26 STAR_10.3
C6: D40.A NEBULA_C.27 STAR_10.4
C7: D41.A NEBULA_C.28 STAR_10.5
C8: D42.A NEBULA_C.1 STAR_11.2
C9: D43.A NEBULA_C.2 STAR_11.3
C10: D44.A NEBULA_C.3 STAR_11.4
C11: D45.A NEBULA_C.4 STAR_11.5
C12: D46.A NEBULA_C.5 STAR_12.2
C13: D47.A NEBULA_C.6 STAR_12.3
C14: D48.A NEBULA_C.7 STAR_12.4
C15: D49.A NEBULA_C.8 STAR_12.5
D0: D1.A NEBULA_D.21 STAR_13.2
D1: D50.A NEBULA_D.22 STAR_13.3
D2: D51.A NEBULA_D.23 STAR_13.4
D3: D52.A NEBULA_D.24 STAR_13.5
D4: D53.A NEBULA_D.25 STAR_14.2
D5: D54.A NEBULA_D.26 STAR_14.3
D6: D55.A NEBULA_D.27 STAR_14.4
D7: D56.A NEBULA_D.28 STAR_14.5
D8: D57.A NEBULA_D.1 STAR_15.2
D9: D58.A NEBULA_D.2 STAR_15.3
D10: D59.A NEBULA_D.3 STAR_15.4
D11: D60.A NEBULA_D.4 STAR_15.5
D12: D61.A NEBULA_D.5 STAR_16.2
D13: D62.A NEBULA_D.6 STAR_16.3
D14: D63.A NEBULA_D.7 STAR_16.4
D15: D64.A NEBULA_D.8 STAR_16.5
E0: D65.A NEBULA_E.21 STAR_17.2
E1: D66.A NEBULA_E.22 STAR_17.3
E2: D67.A NEBULA_E.23 STAR_17.4
E3: D68.A NEBULA_E.24 STAR_17.5
E4: D69.A NEBULA_E.25 STAR_18.2
E5: D70.A NEBULA_E.26 STAR_18.3
E6: D71.A NEBULA_E.27 STAR_18.4
E7: D72.A NEBULA_E.28 STAR_18.5
E8: D73.A NEBULA_E.1 STAR_19.2
E9: D74.A NEBULA_E.2 STAR_19.3
E10: D75.A NEBULA_E.3 STAR_19.4
E11: D76.A NEBULA_E.4 STAR_19.5
E12: D77.A NEBULA_E.5 STAR_20.2
E13: D78.A NEBULA_E.6 STAR_20.3
E14: D79.A NEBULA_E.7 STAR_20.4
E15: D80.A NEBULA_E.8 STAR_20.5
F0: IC1.2 NEBULA_F.21
F1: IC1.3 NEBULA_F.22
F2: IC3.2 NEBULA_F.23
F3: IC3.3 NEBULA_F.24
F4: IC4.2 NEBULA_F.25
F5: IC4.3 NEBULA_F.26
F6: IC5.2 NEBULA_F.27
F7: IC5.3 NEBULA_F.28
F8: IC6.2 NEBULA_F.1
F9: IC6.3 NEBULA_F.2
F10: IC7.2 NEBULA_F.3
F11: IC7.3 NEBULA_F.4
F12: IC8.2 NEBULA_F.5
F13: IC8.3 NEBULA_F.6
F14: IC9.2 NEBULA_F.7
F15: IC9.3 NEBULA_F.8
G0: IC10.2 NEBULA_G.21
G1: IC10.3 NEBULA_G.22
G2: IC11.2 NEBULA_G.23
G3: IC11.3 NEBULA_G.24
G4: IC12.2 NEBULA_G.25
G5: IC12.3 NEBULA_G.26
G6: IC13.2 NEBULA_G.27
G7: IC13.3 NEBULA_G.28
G8: IC14.2 NEBULA_G.1
G9: IC14.3 NEBULA_G.2
G10: IC15.2 NEBULA_G.3
G11: IC15.3 NEBULA_G.4
G12: IC16.2 NEBULA_G.5
G13: IC16.3 NEBULA_G.6
G14: IC17.2 NEBULA_G.7
G15: IC17.3 NEBULA_G.8
GND [GND]: ACCESSORY.1 ACCESSORY_GPIO.1 C1.2 C2.2 C3.2 C4.2 C5.2 C7.2 C8.2 C9.2 C10.2 C11.2 C12.2 C13.2 C14.2 C15.2 C16.2 C17.2 C18.2 C19.2 C20.2 C21.2 C22.2 C23.2 C24.2 C25.2 C26.2 C27.2 C28.2 C29.2 C30.2 C31.2 C32.2 C33.2 C34.2 GAME_INTERFACE.1 IC1.5 IC2.1 IC3.5 IC4.5 IC5.5 IC6.5 IC7.5 IC8.5 IC9.5 IC10.5 IC11.5 IC12.5 IC13.5 IC14.5 IC15.5 IC16.5 IC17.5 IC18.5 IC19.5 IC20.5 IC21.5 JTAG.1 LEDARRAY.1 NEBULA_A.10 NEBULA_A.15 NEBULA_A.16 NEBULA_A.17 NEBULA_B.10 NEBULA_B.16 NEBULA_B.17 NEBULA_C.10 NEBULA_C.15 NEBULA_C.17 NEBULA_D.10 NEBULA_D.17 NEBULA_E.10 NEBULA_E.15 NEBULA_E.16 NEBULA_F.10 NEBULA_F.16 NEBULA_G.10 NEBULA_G.15 NEBULA_H.10 POWER_IN.1 POWER_IN.3 R3.1 R4.1 R5.1 R6.1 R7.1 R8.1 R9.1 R10.1 R11.1 R12.1 R13.1 R14.1 R15.1 R16.1 R17.1 R18.1 R19.1 R20.1 R21.1 R22.1 R23.1 R24.1 R25.1 R28.1 R29.1 R30.1 R31.1 R32.1 R33.1 R34.1 R35.1 R36.1 R37.1 R38.1 R39.1 R40.1 R41.1 R42.1 R43.1 R44.1 R45.1 R46.1 R47.1 R48.1 R49.1 R50.1 R51.1 R52.1 R53.1 R66.1 R67.2 R69.1 R70.1 R71.1 R72.1 R73.1 R74.1 R75.1 R76.1 R77.1 R78.1 R79.1 R80.1 R81.1 R82.1 R87.1 R88.1 R89.1 R90.1 R91.1 R92.1 R93.1 R94.1 R95.1 R96.1 R97.1 R98.1 R99.1 R100.1 R101.1 R102.1 STAR_1.1 STAR_2.1 STAR_3.1 STAR_4.1 STAR_5.1 STAR_6.1 STAR_7.1 STAR_8.1 STAR_9.1 STAR_10.1 STAR_11.1 STAR_12.1 STAR_13.1 STAR_14.1 STAR_15.1 STAR_16.1 STAR_17.1 STAR_18.1 STAR_19.1 STAR_20.1 U$1.2 U$1.29 ULN1.9
H0: IC18.2 NEBULA_H.21
H1: IC18.3 NEBULA_H.22
H2: IC19.2 NEBULA_H.23
H3: IC19.3 NEBULA_H.24
H4: IC20.2 NEBULA_H.25
H5: IC20.3 NEBULA_H.26
H6: IC21.2 NEBULA_H.27
H7: IC21.3 NEBULA_H.28
H8: GAME_INTERFACE.2 NEBULA_H.1
H9: GAME_INTERFACE.3 NEBULA_H.2
H10: GAME_INTERFACE.4 NEBULA_H.3
H11: GAME_INTERFACE.5 NEBULA_H.4
H12: GAME_INTERFACE.6 NEBULA_H.5
H13: ACCESSORY_GPIO.2 NEBULA_H.6 ULN1.3
H14: ACCESSORY_GPIO.3 NEBULA_H.7 ULN1.2
H15: ACCESSORY_GPIO.4 NEBULA_H.8 ULN1.1
N$1: C1.1 U$1.16
N$2: R55.2 STAR_2.6
N$3: D2.C R3.2
N$4: D3.C R4.2
N$5: D4.C R5.2
N$6: D5.C R6.2
N$7: R56.2 STAR_3.6
N$8: R57.2 STAR_4.6
N$9: R54.2 STAR_1.6
N$10: R58.2 STAR_5.6
N$11: D6.C R7.2
N$12: D7.C R8.2
N$13: D8.C R9.2
N$14: D9.C R10.2
N$15: R59.2 STAR_6.6
N$16: R60.2 STAR_7.6
N$17: R61.2 STAR_8.6
N$18: R65.2 STAR_12.6
N$19: R64.2 STAR_11.6
N$20: D10.C R11.2
N$21: D11.C R12.2
N$22: D12.C R13.2
N$23: D13.C R14.2
N$24: R63.2 STAR_10.6
N$25: R62.2 STAR_9.6
N$26: D1.C R53.2
N$27: D50.C R66.2
N$28: D14.C R15.2
N$29: D15.C R16.2
N$30: D16.C R17.2
N$31: D17.C R18.2
N$32: D51.C R69.2
N$33: D52.C R70.2
N$34: D65.C R87.2
N$35: D53.C R71.2
N$36: D18.C R19.2
N$37: D19.C R20.2
N$38: D20.C R21.2
N$39: D21.C R22.2
N$40: D54.C R72.2
N$41: D55.C R73.2
N$42: D56.C R74.2
N$43: D57.C R75.2
N$44: D22.C R23.2
N$45: D23.C R24.2
N$46: D24.C R25.2
N$47: D25.C R28.2
N$48: D58.C R76.2
N$49: D59.C R77.2
N$50: D60.C R78.2
N$51: GAME_INTERFACE.7 ULN1.11
N$52: D26.C R29.2
N$53: D27.C R30.2
N$54: D28.C R31.2
N$55: D29.C R32.2
N$56: GAME_INTERFACE.8 ULN1.12
N$57: GAME_INTERFACE.9 ULN1.13
N$58: GAME_INTERFACE.10 ULN1.14
N$59: GAME_INTERFACE.11 ULN1.15
N$60: D30.C R33.2
N$61: D31.C R34.2
N$62: D32.C R35.2
N$63: D33.C R36.2
N$64: D61.C R79.2
N$65: D62.C R80.2
N$66: D63.C R81.2
N$67: D64.C R82.2
N$68: D34.C R37.2
N$69: D35.C R38.2
N$70: D36.C R39.2
N$71: D37.C R40.2
N$72: R84.2 STAR_14.6
N$73: R85.2 STAR_15.6
N$74: R86.2 STAR_16.6
N$75: R83.2 STAR_13.6
N$76: D38.C R41.2
N$77: D39.C R42.2
N$78: D40.C R43.2
N$79: D41.C R44.2
N$80: D66.C R88.2
N$81: D67.C R89.2
N$82: D68.C R90.2
N$83: D69.C R91.2
N$84: D42.C R45.2
N$85: D43.C R46.2
N$86: D44.C R47.2
N$87: D45.C R48.2
N$88: D70.C R92.2
N$89: J1.2 R68.1
N$90: D71.C R93.2
N$91: D72.C R94.2
N$92: D73.C R95.2
N$93: D46.C R49.2
N$94: D47.C R50.2
N$95: D48.C R51.2
N$96: D49.C R52.2
N$97: D74.C R96.2
N$98: D75.C R97.2
N$99: D76.C R98.2
N$100: D77.C R99.2
N$101: D78.C R100.2
N$102: D79.C R101.2
N$103: D80.C R102.2
N$104: R104.2 STAR_18.6
N$105: R105.2 STAR_19.6
N$106: R106.2 STAR_20.6
N$107: R103.2 STAR_17.6
N$108: IC1.7 STAR_1.7
N$109: IC1.6 STAR_1.8
N$110: IC3.7 STAR_2.7
N$111: IC3.6 STAR_2.8
N$112: IC4.7 STAR_3.7
N$113: IC4.6 STAR_3.8
N$114: IC5.7 STAR_4.7
N$115: IC5.6 STAR_4.8
N$116: IC6.7 STAR_5.7
N$117: IC6.6 STAR_5.8
N$118: IC7.7 STAR_6.7
N$119: IC7.6 STAR_6.8
N$120: IC8.7 STAR_7.7
N$121: IC8.6 STAR_7.8
N$122: IC9.7 STAR_8.7
N$123: IC9.6 STAR_8.8
N$124: IC10.7 STAR_9.7
N$125: IC10.6 STAR_9.8
N$126: IC11.7 STAR_10.7
N$127: IC11.6 STAR_10.8
N$128: IC12.7 STAR_11.7
N$129: IC12.6 STAR_11.8
N$130: IC13.7 STAR_12.7
N$131: IC13.6 STAR_12.8
N$132: IC14.7 STAR_13.7
N$133: IC14.6 STAR_13.8
N$134: IC15.7 STAR_14.7
N$135: IC15.6 STAR_14.8
N$136: IC16.7 STAR_15.7
N$137: IC16.6 STAR_15.8
N$138: IC17.7 STAR_16.7
N$139: IC17.6 STAR_16.8
N$140: IC18.7 STAR_17.7
N$141: IC18.6 STAR_17.8
N$142: IC19.7 STAR_18.7
N$143: IC19.6 STAR_18.8
N$144: IC20.7 STAR_19.7
N$145: IC20.6 STAR_19.8
N$146: IC21.7 STAR_20.7
N$147: IC21.6 STAR_20.8
N$148: ACCESSORY.2 ULN1.16
N$149: ACCESSORY.3 ULN1.17
N$150: ACCESSORY.4 ULN1.18

## Tracks (layer width: path | path; a pad name or v marks a point on that pad's centre or on a via)
4  (via drill 0.35)
  Top 0.305: v123.83,18.41 123.83,36.83 129.54,42.55 129.54,47.62 127.64,49.53 127,49.53 LEDARRAY.2
  Bottom 0.305: v123.83,18.41 109.22,3.81 75.56,3.81 73.66,1.91 58.42,1.91 58.42,4.45 57.78,5.08 38.1,5.08 36.83,3.81 U$1.5
12
  Bottom 0.305: JTAG.2 117.47,26.04 116.2,24.77 37.47,24.77 34.29,27.94 U$1.27
13  (via drill 0.35)  (1 unrouted)
  Top 0.305: 118.11,10.79 118.11,7.62 J1.1 | JTAG.3 122.56,15.24 118.11,10.79 | 118.11,10.79 R67.1 | 87.63,107.31 87.63,101.6 87,100.97 87,99.69 R86.1 | 87.63,107.31 87,107.95 R85.1 | 87,113.67 87,115.57 R84.1 | 87,113.67 87.63,113.03 87.63,107.31 | v86.36,121.28 86.36,122.56 R83.1 | 87,113.67 v86.36,113.67 | 84.45,69.85 84.45,70.48 83.82,71.12 83.82,76.2 85.09,77.47 | 84.45,84.45 84.45,83.19 83.82,82.55 83.82,78.74 85.09,77.47 | 85.09,77.47 R105.1 | 84.45,84.45 83.82,85.09 83.82,89.53 84.45,90.17 84.45,92.08 R103.1 | 84.45,84.45 R104.1 | 33.66,114.94 33.02,114.3 33.02,109.22 33.66,108.58 33.66,107.31 R63.1 34.29,107.31 v34.29,106.05 | 33.66,114.94 33.02,115.57 33.02,120.02 33.66,120.65 33.66,122.56 R65.1 | 33.66,114.94 R64.1 | R62.1 31.75,99.69 29.21,97.16 29.21,93.98 31.11,92.08 R61.1 34.29,92.08 v34.29,90.17 | 33.66,38.73 33.66,30.48 31.75,28.57 U$1.28 | 33.66,46.35 33.66,44.45 33.02,43.81 33.02,39.37 33.66,38.73 | 33.66,38.73 R54.1 | v33.66,52.07 33.66,53.98 R56.1 | 33.66,46.35 v33.66,47.62 | 33.66,46.35 R55.1 | v33.66,59.69 33.66,61.59 R57.1 | v33.66,67.31 33.66,69.22 R58.1 | v31.75,74.93 33.66,76.83 R59.1 | v34.29,82.55 34.29,84.45 R60.1 | v84.45,68.58 84.45,69.85 | 84.45,69.85 R106.1
  $GND 0.305: 86.68,116.84 86.68,121.28 | v33.66,47.62 v33.66,52.07
  SIGNAL3 0.305: v86.36,113.67 v86.36,121.28 | v33.66,52.07 v33.66,59.69 v33.66,67.31 | v31.75,74.93 34.29,77.47 v34.29,82.55 v34.29,90.17
  Bottom 0.305: v31.75,74.93 29.84,73.03 20.95,73.03 19.68,71.75 19.68,68.58 32.38,68.58 | v33.66,67.31 32.38,68.58 | v34.29,106.05 35.56,104.78 53.98,104.78 55.24,103.5 | 55.24,103.5 55.24,90.17 v34.29,90.17 | 32.38,68.58 v84.45,68.58 | v86.36,113.67 85.72,113.03 83.82,113.03 83.19,113.67 75.56,113.67 68.58,106.68 58.42,106.68 55.24,103.5 | JTAG.3 120.02,20.95 38.73,20.95 31.75,27.94 U$1.28
14
  Bottom 0.305: JTAG.4 121.92,20.32 38.1,20.32 34.92,23.5 30.48,23.5 30.48,29.21 31.11,29.84 34.92,29.84 36.2,28.57 U$1.26
15
  Bottom 0.305: JTAG.5 108.58,4.45 92.08,4.45 88.27,8.26 75.56,8.26 74.3,6.99 34.92,6.99 31.75,3.81 U$1.3
16  (via drill 0.35)
  Top 0.305: v128.27,69.85 IC21.1 | v128.91,74.93 126.36,77.47 IC20.1 | v126.36,83.82 126.36,85.09 IC19.1 | v126.36,91.44 126.36,92.71 IC18.1 | v126.36,99.06 126.36,100.33 IC17.1 | v126.36,106.68 126.36,107.95 IC16.1 | v126.36,114.3 126.36,115.57 IC15.1 | v126.36,121.92 126.36,123.19 IC14.1 | v64.14,76.2 64.14,77.47 IC7.1 | v64.14,82.55 64.14,85.09 IC8.1 | v63.5,91.44 63.5,92.71 IC9.1 | v63.5,99.06 63.5,100.33 IC10.1 | v63.5,105.41 63.5,107.95 IC11.1 | v64.14,113.03 64.14,115.57 IC12.1 | v62.23,123.19 IC13.1 | 65.41,29.84 39.37,3.81 U$1.6 | 65.41,29.84 67.31,31.75 67.31,33.66 64.14,36.83 64.14,39.37 IC1.1 | v63.5,45.72 63.5,46.99 IC3.1 | 65.41,29.84 v62.87,32.38 | v63.5,53.34 63.5,54.61 IC4.1 | v63.5,59.69 63.5,62.23 IC5.1 | v63.5,67.31 63.5,69.85 | 63.5,69.85 v62.23,69.85 | 63.5,69.85 IC6.1
  SIGNAL3 0.305: v64.14,113.03 64.14,106.05 v63.5,105.41 | v63.5,59.69 v63.5,67.31
  Bottom 0.305: v128.27,69.85 129.54,71.12 129.54,74.93 v128.91,74.93 126.36,74.93 | 126.36,74.93 v126.36,83.82 v126.36,91.44 v126.36,99.06 v126.36,106.68 v126.36,114.3 v126.36,121.92 | v63.5,105.41 v63.5,99.06 v63.5,91.44 57.15,85.09 57.15,82.55 v64.14,82.55 v64.14,76.2 64.14,74.93 | v62.23,123.19 59.05,120.02 59.05,118.11 v64.14,113.03 | v63.5,45.72 62.23,44.45 61.59,44.45 | 61.59,44.45 59.05,41.91 59.05,32.38 v62.87,32.38 | 61.59,44.45 60.96,44.45 60.96,50.8 v63.5,53.34 v63.5,59.69 | 64.14,74.93 64.14,69.85 v62.23,69.85 | 64.14,74.93 126.36,74.93
17  (via drill 0.35)
  Top 0.305: 64.14,50.8 64.14,52.07 67.31,55.24 67.31,57.15 66.04,58.42 | IC4.4 66.04,58.42 | IC5.4 64.77,66.04 66.04,64.77 66.04,58.42 | IC1.4 64.77,43.18 66.04,41.91 | 66.04,41.91 67.94,40.01 67.94,31.11 41.91,5.08 41.91,3.81 U$1.7 | v66.04,50.8 64.14,50.8 | 66.04,41.91 v66.04,47.62 | 64.14,50.8 IC3.4 | 127,113.67 128.27,114.94 128.27,118.11 127,119.38 | 127,113.67 126.36,113.03 126.36,111.76 IC16.4 | IC21.4 128.91,73.66 130.18,74.93 130.18,78.11 128.91,79.38 | 128.91,79.38 127,81.28 IC20.4 | 127,88.9 128.91,87 128.91,79.38 | IC18.4 127,96.52 128.27,95.25 | 128.27,95.25 129.54,93.98 129.54,91.44 127,88.9 | 127,88.9 IC19.4 | 127,104.14 128.27,102.87 128.27,95.25 | 127,113.67 129.54,111.12 129.54,106.68 127,104.14 | 127,104.14 IC17.4 | 66.67,78.11 66.67,79.38 65.41,80.64 | 66.67,78.11 66.67,76.2 64.14,73.66 IC6.4 | 65.41,80.64 64.77,81.28 IC7.4 | IC8.4 65.41,88.9 66.67,87.63 | 66.67,87.63 67.94,86.36 67.94,83.19 65.41,80.64 | 64.77,96.52 IC9.4 64.14,96.52 | 64.77,96.52 66.67,94.61 66.67,87.63 | 66.04,104.14 IC10.4 | 66.04,104.14 67.94,102.23 67.94,99.69 64.77,96.52 | 65.41,119.38 67.31,117.47 67.31,114.94 64.14,111.76 IC11.4 | IC12.4 65.41,119.38 | 66.67,127 68.58,127 73.66,132.08 120.65,132.08 125.73,127 IC14.4 127,127 128.27,125.73 128.27,122.56 127,121.28 127,119.38 | 66.67,127 IC13.4 | v66.04,120.02 65.41,119.38 | 66.67,127 v66.67,127.64 | 66.04,104.14 66.04,106.05 v67.94,107.95 | 127,119.38 IC15.4 | 66.67,78.11 v68.58,78.11
  SIGNAL3 0.305: v67.94,107.95 67.94,118.11 v66.04,120.02 | v66.04,50.8 71.12,55.88 71.12,60.33 69.22,62.23 69.22,71.75 68.58,72.39 v68.58,78.11
  Bottom 0.305: v66.04,47.62 v66.04,50.8 | v66.04,120.02 66.04,127.64 v66.67,127.64
18  (via drill 0.35)
  Top 0.305: v83.19,69.85 NEBULA_E.19
  SIGNAL3 0.305: v83.19,69.85 83.19,62.23 85.09,60.33 85.09,55.88 60.96,31.75 60.96,17.78 46.99,3.81 U$1.9
19  (via drill 0.35)
  Top 0.305: NEBULA_F.19 82.55,47.62 83.19,46.99 v83.19,46.35
  SIGNAL3 0.305: v83.19,46.35 61.59,24.77 61.59,15.88 49.53,3.81 U$1.10
21/SDA  (via drill 0.35)
  Top 0.305: 5.71,50.16 NEBULA_A.13 | 5.71,50.16 1.27,54.61 1.27,75.56 5.71,80.01 | 5.71,80.01 6.35,80.64 NEBULA_B.13 | NEBULA_C.13 6.35,111.12 v2.54,107.31 | 5.71,80.01 v3.17,82.55 | v75.56,2.54 75.56,4.45 R26.1 76.2,4.45 76.2,6.35 88.9,19.05 88.9,27.94 90.81,29.84 90.81,40.64 87.63,43.81 | v74.3,43.81 NEBULA_F.13 | NEBULA_H.13 87.63,43.81 | 87.63,43.81 v85.09,43.81 | NEBULA_E.13 71.12,66.04 70.48,65.41 70.48,64.14 v74.3,60.33 | 73.03,88.27 NEBULA_D.13 72.39,88.27 | 73.03,88.27 73.66,87.63 73.66,83.82 v73.03,83.19 | NEBULA_G.13 71.12,111.12 70.48,110.49 70.48,107.31 v71.12,106.68 | v74.3,90.81 74.3,89.53 73.03,88.27 | 5.71,50.16 5.71,35.56 35.56,5.71 35.56,3.17 36.83,1.91 50.16,1.91 51.44,3.17 U$1.11
  SIGNAL3 0.305: v73.03,83.19 73.03,61.59 v74.3,60.33
  Bottom 0.305: v2.54,107.31 2.54,82.55 v3.17,82.55 | v75.56,2.54 74.3,1.27 53.98,1.27 52.07,3.17 U$1.11 | v74.3,43.81 v85.09,43.81 87.63,43.81 87.63,49.53 78.74,58.42 76.2,58.42 v74.3,60.33 | v71.12,106.68 71.12,90.81 v74.3,90.81
22/SCL  (via drill 0.35)
  Top 0.305: v70.48,89.53 NEBULA_D.12 | v69.85,95.89 69.85,111.12 71.12,112.39 NEBULA_G.12 | v5.71,81.92 NEBULA_B.12 | v5.08,111.12 6.35,112.39 NEBULA_C.12 | v75.56,6.99 75.56,8.26 R27.1 | NEBULA_A.12 8.26,51.44 8.89,50.8 | 8.89,50.8 19.05,40.64 19.05,24.13 v37.47,5.71 | U$1.14 59.69,3.81 59.69,21.59 68.58,30.48 68.58,42.55 71.12,45.09 NEBULA_F.12 v75.56,45.09 | v86.36,45.09 NEBULA_H.12 | NEBULA_E.12 75.56,67.31 84.45,58.42 v84.45,50.16 | 8.89,50.8 v9.53,51.44
  SIGNAL3 0.305: v69.85,95.89 55.24,95.89 51.44,99.69 16.51,99.69 v5.08,111.12 | v5.71,81.92 5.71,64.14 4.45,62.87 4.45,56.52 v9.53,51.44
  Bottom 0.305: v70.48,89.53 70.48,95.89 v69.85,95.89 | v5.71,81.92 3.81,83.82 3.81,111.12 v5.08,111.12 | v75.56,6.99 73.66,5.08 60.96,5.08 60.33,4.45 | 60.33,4.45 59.69,3.81 U$1.14 | v37.47,5.71 59.05,5.71 60.33,4.45 | v75.56,45.09 84.45,45.09 | 84.45,45.09 v86.36,45.09 | 84.45,45.09 v84.45,50.16
23  (via drill 0.35)
  Top 0.305: v118.75,62.23 ULN1.8 | v88.27,36.83 88.27,29.84 62.23,3.81 U$1.15
  Bottom 0.305: v118.75,62.23 117.47,60.96 97.79,60.96 95.89,62.87 85.09,62.87 82.55,60.33 82.55,55.88 88.27,50.16 v88.27,36.83
25  (via drill 0.35)
  Top 0.305: v120.02,62.23 ULN1.7
  SIGNAL3 0.305: v83.82,60.33 81.92,60.33 59.05,37.47 59.05,29.84 58.42,29.21 58.42,27.94 57.15,26.67 45.72,26.67 44.45,27.94 U$1.23
  Bottom 0.305: v120.02,62.23 118.11,60.33 v83.82,60.33
26  (via drill 0.35)
  Top 0.305: v121.28,63.5 ULN1.6 | v50.8,36.83 41.91,27.94 U$1.24
  Bottom 0.305: v121.28,63.5 80.64,63.5 78.74,61.59 64.14,61.59 57.15,54.61 57.15,36.83 v50.8,36.83
27  (via drill 0.35)
  Top 0.305: ULN1.5 122.56,63.5 123.83,62.23 126.36,62.23 130.18,58.42 130.18,31.75 v125.09,26.67 | v43.81,31.11 41.91,31.11 39.37,28.57 U$1.25
  Bottom 0.305: v125.09,26.67 124.46,27.3 67.94,27.3 64.14,31.11 v43.81,31.11
32  (via drill 0.35)
  Top 0.305: v90.17,26.04 105.41,41.27 105.41,51.44 103.5,53.34 103.5,56.52 113.03,66.04 123.19,66.04 123.83,65.41 ULN1.4
  Bottom 0.305: v90.17,26.04 51.44,26.04 49.53,27.94 U$1.21
33  (via drill 0.35)
  Top 0.305: NEBULA_H.19 101.6,47.62 102.23,46.99 102.23,41.91 v93.98,33.66 | v66.04,33.66 52.07,33.66 46.99,28.57 U$1.22 | NEBULA_G.19 80.01,114.94 v72.39,107.31
  SIGNAL3 0.305: v72.39,107.31 72.39,97.16 69.85,94.61 62.87,94.61 62.23,95.25 61.59,95.25 56.52,90.17 56.52,74.3 57.78,73.03 57.78,39.37 46.99,28.57 U$1.22
  Bottom 0.305: v66.04,33.66 v93.98,33.66
34
  Top 0.305: NEBULA_A.19 17.78,53.98 19.68,52.07 19.68,40.01 30.48,29.21 30.48,27.94 31.75,26.67 52.7,26.67 53.98,27.94 U$1.19
35  (via drill 0.35)
  Top 0.305: NEBULA_B.19 17.78,84.45 18.41,83.82 18.41,69.22 13.97,64.77 13.97,58.42 v10.16,54.61
  Bottom 0.305: v10.16,54.61 34.29,30.48 43.18,30.48 43.81,29.84 50.16,29.84 51.44,28.57 U$1.20
36  (via drill 0.35)
  Top 0.305: v14.61,114.94 NEBULA_C.19 | v25.4,24.77 55.88,24.77 59.05,27.94 U$1.17
  Bottom 0.305: v14.61,114.94 12.06,112.39 3.81,112.39 1.27,109.86 1.27,24.77 v25.4,24.77
39  (via drill 0.35)
  Top 0.305: NEBULA_D.19 82.55,92.08 v83.19,91.44
  SIGNAL3 0.305: v58.42,83.82 58.42,30.48 56.52,28.57 U$1.18
  Bottom 0.305: v83.19,91.44 76.83,85.09 59.69,85.09 v58.42,83.82
+3V3  (via drill 0.35)
  Top 0.508: NEBULA_C.16 15.88,111.12 14.61,112.39 | 14.61,112.39 10.79,116.2 NEBULA_C.9 C9.1 3.81,116.2 3.81,109.86 1.27,107.31 1.27,88.9 4.45,85.72 | 14.61,112.39 15.88,113.67 NEBULA_C.18 v19.68,113.67 | C8.1 NEBULA_A.9 8.26,55.24 8.89,54.61 | NEBULA_A.18 10.79,52.7 8.89,54.61 | 4.45,85.72 NEBULA_B.9 8.26,85.72 12.7,81.28 | NEBULA_B.15 14.61,79.38 13.34,80.64 | 12.7,81.28 13.34,80.64 | NEBULA_B.18 15.88,83.19 13.34,80.64 | 8.89,54.61 12.7,58.42 12.7,81.28 | 4.45,85.72 C10.1 | IC6.8 57.78,69.85 59.69,67.94 C18.1 60.33,67.94 | IC5.8 57.78,62.23 59.69,60.33 C17.1 60.33,60.33 | IC4.8 57.78,54.61 59.69,52.7 C16.1 60.33,52.7 | 59.69,45.09 57.78,46.99 IC3.8 | 59.69,45.09 59.69,40.01 59.05,39.37 IC1.8 57.78,39.37 59.69,37.47 C14.1 60.33,37.47 v60.33,35.56 | 59.69,45.09 C15.1 60.33,45.09 60.33,52.7 | 60.33,52.7 60.33,60.33 | 60.33,60.33 60.33,67.94 | 60.33,67.94 60.33,75.56 C19.1 59.69,75.56 57.78,77.47 IC7.8 59.05,77.47 59.69,78.11 59.69,83.19 C20.1 60.33,83.19 60.33,85.09 | NEBULA_G.9 71.12,116.2 69.22,118.11 v69.22,118.75 69.22,121.28 C13.1 | IC13.8 57.78,123.19 59.69,121.28 C25.1 60.33,121.28 60.33,118.75 | 57.78,115.57 59.69,113.67 C24.1 60.33,113.67 | IC11.8 57.78,107.95 59.69,106.05 C23.1 60.33,106.05 | 59.69,98.42 57.78,100.33 IC10.8 | 60.33,90.81 60.33,85.09 | 60.33,85.09 IC8.8 | 60.33,90.81 59.69,91.44 | 59.69,91.44 58.42,92.71 IC9.8 | 60.33,90.81 C21.1 59.69,91.44 | 59.69,91.44 59.69,98.42 | 59.69,98.42 C22.1 60.33,98.42 60.33,106.05 | 60.33,106.05 60.33,113.67 | 60.33,113.67 60.33,118.75 | 60.33,118.75 v60.96,118.75 | v34.29,113.67 55.88,113.67 57.78,115.57 | 57.78,115.57 IC12.8 | C3.1 26.67,10.79 26.67,3.81 U$1.1
  Top 0.508: 74.3,8.26 74.3,4.45 | R68.2 107.31,3.17 105.41,1.27 75.56,1.27 74.3,2.54 74.3,4.45 | 74.3,4.45 R26.2 | v67.94,8.26 R27.2 74.3,8.26 | IC14.8 120.02,123.19 121.92,121.28 C33.1 122.56,121.28 122.56,113.67 | IC15.8 120.02,115.57 121.92,113.67 C32.1 122.56,113.67 | IC16.8 120.02,107.95 121.92,106.05 C31.1 122.56,106.05 | IC17.8 120.02,100.33 121.92,98.42 C30.1 122.56,98.42 | IC18.8 120.02,92.71 121.92,90.81 C29.1 122.56,90.81 | IC19.8 120.02,85.09 121.92,83.19 C28.1 122.56,83.19 | 120.02,69.85 121.92,67.94 C26.1 | 121.92,75.56 120.02,77.47 IC20.8 | 121.92,75.56 121.92,70.48 121.28,69.85 IC21.8 120.02,69.85 | 121.92,75.56 C27.1 122.56,75.56 122.56,83.19 | 122.56,83.19 122.56,90.81 | 122.56,90.81 122.56,98.42 | 122.56,98.42 122.56,106.05 | 122.56,106.05 122.56,113.67 | 100.33,43.81 100.33,42.55 NEBULA_H.15 | 100.33,46.35 100.33,45.09 | 100.33,45.09 100.33,43.81 | 100.33,43.81 NEBULA_H.16 | 100.33,45.09 NEBULA_H.17 | C12.1 NEBULA_F.9 78.11,48.9 81.28,45.72 | 81.28,45.72 81.28,46.35 NEBULA_F.18 | 81.28,45.72 81.28,45.09 NEBULA_F.17 85.09,45.09 | 88.9,48.9 NEBULA_H.9 93.34,48.9 95.89,46.35 100.33,46.35 | NEBULA_F.15 82.55,42.55 83.19,43.18 | 88.9,48.9 85.09,45.09 | 85.09,45.09 83.19,43.18 | 88.9,48.9 C34.1 88.27,48.9 88.27,62.23 83.82,66.67 | 83.19,43.18 89.53,36.83 ACCESSORY_GPIO.5 89.53,29.84 74.3,14.61 74.3,8.26 | 100.33,46.35 NEBULA_H.18 | 81.28,68.58 81.28,67.31 NEBULA_E.17 | C7.1 NEBULA_E.9 74.93,71.12 | 81.28,68.58 77.47,68.58 74.93,71.12 | 81.28,68.58 NEBULA_E.18 81.92,68.58 83.82,66.67 | 81.28,112.39 81.28,111.12 | 81.28,112.39 81.28,113.67 NEBULA_G.18 | 81.28,112.39 NEBULA_G.17 | 81.28,88.27 81.28,87 NEBULA_D.15
  Top 0.508: C11.1 NEBULA_D.9 73.03,93.34 75.56,90.81 76.2,90.81 | 76.2,90.81 77.47,90.81 | 77.47,90.81 NEBULA_D.18 | 81.28,88.27 78.74,88.27 78.11,88.9 | 76.2,90.81 78.11,88.9 | 81.28,88.27 NEBULA_D.16 | 81.28,111.12 78.74,111.12 77.47,109.86 77.47,90.81 | 81.28,111.12 NEBULA_G.16 | 74.93,71.12 78.11,74.3 78.11,88.9 | 120.02,69.85 110.49,69.85 107.31,66.67 83.82,66.67
  Bottom 0.508: v60.96,118.75 v69.22,118.75 | v34.29,113.67 v19.68,113.67 | v67.94,8.26 31.11,8.26 26.67,3.81 U$1.1 | v60.33,35.56 60.96,34.92 93.98,34.92 95.25,33.66 95.25,31.11 ACCESSORY_GPIO.5
+5V  (via drill 0.35)
  Top 1.27: POWER_IN.2 95.3,8.89 102.23,8.89 | 102.23,8.89 IC2.4 | 102.23,8.89 102.23,3.17 C5.1 | v106.05,18.41 106.05,25.4 127.64,46.99 LEDARRAY.3
  Bottom 1.27: U$1.30 26.66,25.41 38.73,13.34 85.72,13.34 POWER_IN.2 93.34,6.35 105.41,18.41 v106.05,18.41
+12V  (via drill 0.35)
  Top 1.27: POWER_IN.4 88.31,12.06 104.14,12.06 | 104.14,12.06 110.49,12.06 110.49,11.21 IC2.3 | v117.47,57.78 ULN1.10 | 104.14,12.06 104.14,13.97 | 104.14,13.97 104.14,16.51 | 104.14,13.97 C2.1 | 104.14,16.51 104.14,26.67 107.95,30.48 ACCESSORY.5 107.95,36.2 121.28,49.53 121.92,49.53 127,54.61 127,55.24 GAME_INTERFACE.12 | 104.14,16.51 C4.1
  Bottom 1.27: v117.47,57.78 118.11,57.15 125.73,57.15 127.64,55.24 GAME_INTERFACE.12
A0  (via drill 0.35)
  Top 0.305: 24.13,44.45 24.13,45.72 20.32,49.53 20.32,53.98 17.78,56.52 NEBULA_A.21 | 24.13,44.45 24.13,43.18 D2.A | 24.13,44.45 v22.86,44.45
  Bottom 0.305: v22.86,44.45 26.67,40.64 40.64,40.64 41.91,41.91 STAR_1.2
A1  (via drill 0.35)
  Top 0.305: v29.84,44.45 28.57,43.18 D3.A | NEBULA_A.22 15.88,57.78 v13.34,55.24
  Bottom 0.305: STAR_1.3 43.81,41.91 42.55,43.18 31.11,43.18 v29.84,44.45 24.13,44.45 v13.34,55.24
A2  (via drill 0.35)
  Top 0.305: v32.38,44.45 32.38,43.18 D4.A | NEBULA_A.23 15.88,59.05 v13.34,56.52
  Bottom 0.305: STAR_1.4 45.72,41.91 43.81,43.81 33.02,43.81 v32.38,44.45 31.11,45.72 24.13,45.72 v13.34,56.52
A3  (via drill 0.35)
  Top 0.305: D5.A 46.35,43.18 47.62,41.91 STAR_1.5 | NEBULA_A.24 17.78,60.33 19.05,59.05 v19.05,56.52
  Bottom 0.305: v19.05,56.52 19.05,52.07 22.23,52.07 27.94,46.35 43.18,46.35 47.62,41.91 STAR_1.5
A4  (via drill 0.35)
  Top 0.305: 22.86,52.07 20.95,53.98 20.95,58.42 17.78,61.59 NEBULA_A.25 | 22.86,52.07 24.13,50.8 D6.A | 22.86,52.07 v23.5,52.07
  Bottom 0.305: v23.5,52.07 25.4,50.16 34.29,50.16 34.92,50.8 40.64,50.8 41.91,49.53 STAR_2.2
A5  (via drill 0.35)
  Top 0.305: 27.94,50.8 26.04,52.7 24.13,52.7 21.59,55.24 21.59,59.05 17.78,62.87 NEBULA_A.26 | 27.94,50.8 v29.21,52.07 | 27.94,50.8 D7.A
  Bottom 0.305: v29.21,52.07 30.48,50.8 33.66,50.8 34.29,51.44 41.91,51.44 43.81,49.53 STAR_2.3
A6  (via drill 0.35)
  Top 0.305: D8.A 44.45,50.8 45.72,49.53 STAR_2.4 | v18.41,64.14 NEBULA_A.27
  Bottom 0.305: v18.41,64.14 20.32,62.23 26.04,62.23 27.3,60.96 53.34,60.96 55.88,58.42 55.88,48.26 47.62,48.26 46.35,49.53 STAR_2.4
A7  (via drill 0.35)
  Top 0.305: v30.48,52.07 31.75,50.8 D9.A | NEBULA_A.28 19.05,65.41 v23.5,60.96
  SIGNAL3 0.305: v23.5,60.96 23.5,59.05 v30.48,52.07
  Bottom 0.305: v30.48,52.07 31.75,53.34 43.81,53.34 47.62,49.53 STAR_2.5
A8  (via drill 0.35)
  Top 0.305: v25.4,55.24 25.4,57.15 24.77,57.78 24.77,58.42 D10.A | NEBULA_A.1 8.26,65.41 v10.16,63.5
  Bottom 0.305: STAR_3.2 41.91,57.15 40.64,55.88 26.04,55.88 v25.4,55.24 22.23,58.42 8.89,58.42 8.89,60.96 10.16,62.23 v10.16,63.5
A9  (via drill 0.35)
  Top 0.305: v29.84,59.69 28.57,58.42 D11.A | NEBULA_A.2 8.26,64.14 v11.43,60.96
  Bottom 0.305: STAR_3.3 43.81,57.15 42.55,58.42 31.11,58.42 v29.84,59.69 12.7,59.69 v11.43,60.96
A10  (via drill 0.35)
  Top 0.305: D12.A 32.38,58.42 32.38,57.78 33.02,57.15 33.02,55.88 33.66,55.24 43.81,55.24 45.72,57.15 STAR_3.4 | v5.71,62.87 NEBULA_A.3
  Bottom 0.305: v5.71,62.87 8.26,60.33 8.26,57.78 21.59,57.78 25.4,53.98 42.55,53.98 45.72,57.15 STAR_3.4
A11  (via drill 0.35)
  Top 0.305: D13.A 46.35,58.42 47.62,57.15 STAR_3.5 | v5.71,61.59 NEBULA_A.4
  SIGNAL3 0.305: v5.71,61.59 16.51,50.8 41.27,50.8 47.62,57.15 STAR_3.5
A12  (via drill 0.35)
  Top 0.305: v20.95,66.04 22.23,67.31 22.86,67.31 24.13,66.04 D14.A | v10.16,60.33 NEBULA_A.5
  Bottom 0.305: STAR_4.2 41.91,64.77 40.64,63.5 23.5,63.5 v20.95,66.04 15.24,66.04 10.16,60.96 v10.16,60.33
A13  (via drill 0.35)
  Top 0.305: v29.84,67.31 28.57,66.04 D15.A | v2.54,59.05 NEBULA_A.6
  Bottom 0.305: STAR_4.3 43.81,64.77 42.55,66.04 31.11,66.04 v29.84,67.31 2.54,67.31 v2.54,59.05
A14  (via drill 0.35)
  Top 0.305: D16.A 32.38,66.04 32.38,65.41 33.02,64.77 33.02,63.5 33.66,62.87 43.81,62.87 45.72,64.77 STAR_4.4 | NEBULA_A.7 9.53,57.78 v11.43,59.69
  SIGNAL3 0.305: v11.43,59.69 20.95,59.69 29.84,68.58 41.91,68.58 45.72,64.77 STAR_4.4
A15  (via drill 0.35)
  Top 0.305: D17.A 46.35,66.04 47.62,64.77 STAR_4.5 | v9.53,56.52 NEBULA_A.8
  Bottom 0.305: v9.53,56.52 26.04,40.01 53.98,40.01 56.52,42.55 56.52,63.5 49.53,63.5 48.26,64.77 STAR_4.5
B0  (via drill 0.35)
  Top 0.305: 20.95,78.11 19.05,80.01 19.05,85.72 17.78,87 NEBULA_B.21 | 20.95,78.11 24.13,74.93 24.13,73.66 D18.A | 20.95,78.11 v20.95,71.75
  Bottom 0.305: v20.95,71.75 29.21,71.75 29.84,71.12 40.64,71.12 41.91,72.39 STAR_5.2
B1  (via drill 0.35)
  Top 0.305: v29.21,70.48 29.21,72.39 28.57,73.03 28.57,73.66 D19.A | NEBULA_B.22 17.78,88.27 v19.05,87
  SIGNAL3 0.305: v19.05,87 19.05,80.64 v29.21,70.48
  Bottom 0.305: v29.21,70.48 41.91,70.48 43.81,72.39 STAR_5.3
B2
  Top 0.305: STAR_5.4 45.72,72.39 43.81,70.48 33.66,70.48 33.02,71.12 33.02,72.39 32.38,73.03 32.38,73.66 D20.A 31.75,73.66 30.48,74.93 25.4,74.93 20.32,80.01 20.32,87 17.78,89.53 NEBULA_B.23
B3  (via drill 0.35)
  Top 0.305: D21.A 46.35,73.66 47.62,72.39 STAR_5.5 | NEBULA_B.24 15.88,90.81 14.61,89.53 14.61,83.19 v13.97,82.55
  Bottom 0.305: v13.97,82.55 20.32,76.2 43.81,76.2 47.62,72.39 STAR_5.5
B4  (via drill 0.35)
  Top 0.305: 22.86,82.55 20.95,84.45 20.95,88.9 17.78,92.08 NEBULA_B.25 | 22.86,82.55 24.13,81.28 D22.A | 22.86,82.55 v23.5,82.55
  Bottom 0.305: v23.5,82.55 24.77,81.28 40.64,81.28 41.91,80.01 STAR_6.2
B5  (via drill 0.35)
  Top 0.305: v29.21,78.11 29.21,80.01 28.57,80.64 28.57,81.28 D23.A | v14.61,93.34 NEBULA_B.26
  Bottom 0.305: 29.84,78.74 v29.21,78.11 | 29.84,78.74 42.55,78.74 43.81,80.01 STAR_6.3 | v14.61,93.34 13.34,94.61 9.53,94.61 8.26,93.34 8.26,83.82 13.97,83.82 19.05,78.74 29.84,78.74
B6
  Top 0.305: STAR_6.4 45.72,80.01 43.81,78.11 33.66,78.11 33.02,78.74 33.02,80.01 32.38,80.64 32.38,81.28 D24.A 31.75,81.28 30.48,82.55 24.77,82.55 21.59,85.72 21.59,91.44 18.41,94.61 NEBULA_B.27
B7  (via drill 0.35)
  Top 0.305: D25.A 46.35,81.28 47.62,80.01 STAR_6.5 | NEBULA_B.28 15.88,95.89 13.34,93.34 v13.34,85.72
  Bottom 0.305: v13.34,85.72 15.24,83.82 23.5,83.82 24.13,83.19 33.66,83.19 34.29,83.82 43.81,83.82 47.62,80.01 STAR_6.5
B8  (via drill 0.35)
  Top 0.305: v25.4,85.72 25.4,87.63 24.77,88.27 24.77,88.9 D26.A | v10.79,95.89 NEBULA_B.1
  SIGNAL3 0.305: v10.79,95.89 17.14,95.89 25.4,87.63 v25.4,85.72
  Bottom 0.305: v25.4,85.72 26.04,86.36 40.64,86.36 41.91,87.63 STAR_7.2
B9  (via drill 0.35)
  Top 0.305: 27.94,88.9 23.5,93.34 21.59,93.34 17.78,97.16 13.34,97.16 10.79,94.61 NEBULA_B.2 | 27.94,88.9 v29.21,90.17 | 27.94,88.9 D27.A
  Bottom 0.305: v29.21,90.17 30.48,88.9 42.55,88.9 43.81,87.63 STAR_7.3
B10  (via drill 0.35)
  Top 0.305: STAR_7.4 45.72,87.63 43.81,85.72 33.66,85.72 33.02,86.36 33.02,87.63 32.38,88.27 32.38,88.9 D28.A 31.75,88.9 29.21,91.44 28.57,90.81 v27.3,90.81 | v9.53,93.34 NEBULA_B.3
  Bottom 0.305: v9.53,93.34 12.06,90.81 v27.3,90.81
B11  (via drill 0.35)
  Top 0.305: D29.A 46.35,88.9 47.62,87.63 STAR_7.5 | NEBULA_B.4 8.26,92.08 v12.06,88.27
  Bottom 0.305: v12.06,88.27 14.61,85.72 24.13,85.72 25.4,84.45 44.45,84.45 47.62,87.63 STAR_7.5
B12  (via drill 0.35)
  Top 0.305: 20.95,97.79 6.99,97.79 5.71,96.52 5.71,91.44 6.35,90.81 NEBULA_B.5 | 20.95,97.79 22.86,97.79 24.13,96.52 D30.A | 20.95,97.79 v20.95,96.52
  Bottom 0.305: v20.95,96.52 40.64,96.52 41.91,95.25 STAR_8.2
B13  (via drill 0.35)
  Top 0.305: D31.A 28.57,96.52 v28.57,97.79 26.04,97.79 24.77,99.06 6.99,99.06 5.08,97.16 5.08,90.81 6.35,89.53 NEBULA_B.6
  Bottom 0.305: v28.57,97.79 29.21,97.16 41.91,97.16 43.81,95.25 STAR_8.3
B14  (via drill 0.35)
  Top 0.305: D32.A 32.38,96.52 32.38,95.89 33.02,95.25 33.02,93.98 33.66,93.34 43.81,93.34 45.72,95.25 STAR_8.4 | v10.79,88.27 NEBULA_B.7
  Bottom 0.305: v10.79,88.27 12.06,89.53 27.3,89.53 29.84,92.08 42.55,92.08 45.72,95.25 STAR_8.4
B15  (via drill 0.35)
  Top 0.305: D33.A 46.35,96.52 47.62,95.25 STAR_8.5 | v5.71,87 NEBULA_B.8
  Bottom 0.305: v5.71,87 5.71,99.06 43.81,99.06 47.62,95.25 STAR_8.5
C0  (via drill 0.35)
  Top 0.305: v25.4,100.97 25.4,102.87 24.77,103.5 24.77,104.14 D34.A | NEBULA_C.21 15.88,117.47 v14.61,116.2
  Bottom 0.305: 26.04,101.6 v25.4,100.97 | 26.04,101.6 40.64,101.6 41.91,102.87 STAR_9.2 | v14.61,116.2 20.95,109.86 20.95,101.6 26.04,101.6
C1  (via drill 0.35)
  Top 0.305: v30.48,106.05 28.57,104.14 D35.A | NEBULA_C.22 17.78,118.75 18.41,118.11 v18.41,115.57
  Bottom 0.305: STAR_9.3 43.81,102.87 42.55,104.14 32.38,104.14 v30.48,106.05 21.59,106.05 21.59,110.49 18.41,113.67 v18.41,115.57
C2  (via drill 0.35)
  Top 0.305: D36.A 32.38,104.14 32.38,103.5 33.02,102.87 33.02,101.6 33.66,100.97 43.81,100.97 45.72,102.87 STAR_9.4 | NEBULA_C.23 17.78,120.02 v18.41,119.38
  SIGNAL3 0.305: v18.41,119.38 18.41,116.84 31.11,104.14 44.45,104.14 45.72,102.87 STAR_9.4
C3  (via drill 0.35)
  Top 0.305: D37.A 46.35,104.14 47.62,102.87 STAR_9.5 | NEBULA_C.24 15.88,121.28 13.34,118.75 13.34,114.94 v14.61,113.67
  Bottom 0.305: v14.61,113.67 14.61,99.69 44.45,99.69 47.62,102.87 STAR_9.5
C4  (via drill 0.35)
  Top 0.305: 22.86,114.3 19.68,117.47 19.68,120.65 17.78,122.56 NEBULA_C.25 | 22.86,114.3 24.13,113.03 24.13,111.76 D38.A | 22.86,114.3 v20.95,112.39
  Bottom 0.305: v20.95,112.39 40.01,112.39 41.91,110.49 STAR_10.2
C5  (via drill 0.35)
  Top 0.305: v29.21,108.58 29.21,110.49 28.57,111.12 28.57,111.76 D39.A | v18.41,123.83 NEBULA_C.26
  SIGNAL3 0.305: v18.41,123.83 18.41,120.65 29.21,109.86 v29.21,108.58
  Bottom 0.305: v29.21,108.58 29.84,109.22 42.55,109.22 43.81,110.49 STAR_10.3
C6  (via drill 0.35)
  Top 0.305: 20.32,120.65 20.32,123.19 18.41,125.09 NEBULA_C.27 | 20.32,120.65 20.32,118.11 24.13,114.3 29.21,114.3 31.75,111.76 D40.A | 20.32,120.65 v22.86,120.65